# Altium PCB 175-00002 rev 4, PCB, Sinistro Clock Gen.PcbDoc (part 1 of 6)
Units mil, origin at the board's own origin, x right, y up, seen from the top; angles counter-clockwise.
Board outline 5905.51 x 4330.71 mil, 10 copper layers (Top Layer (.GTL), MidLayer1 (*.G1), +12V (*.GP1), -12V (*.GP2), A & GND (*.GP3), Chassis E (*.GP4), +28V & VCC (*.GP5), MidLayer2 (*.G2), MidLayer3 (*.G3), Bottom Layer (.GBL)), stack 64.6 mil thick; 505 components, 332 nets, 1954 pads, 918 vias.
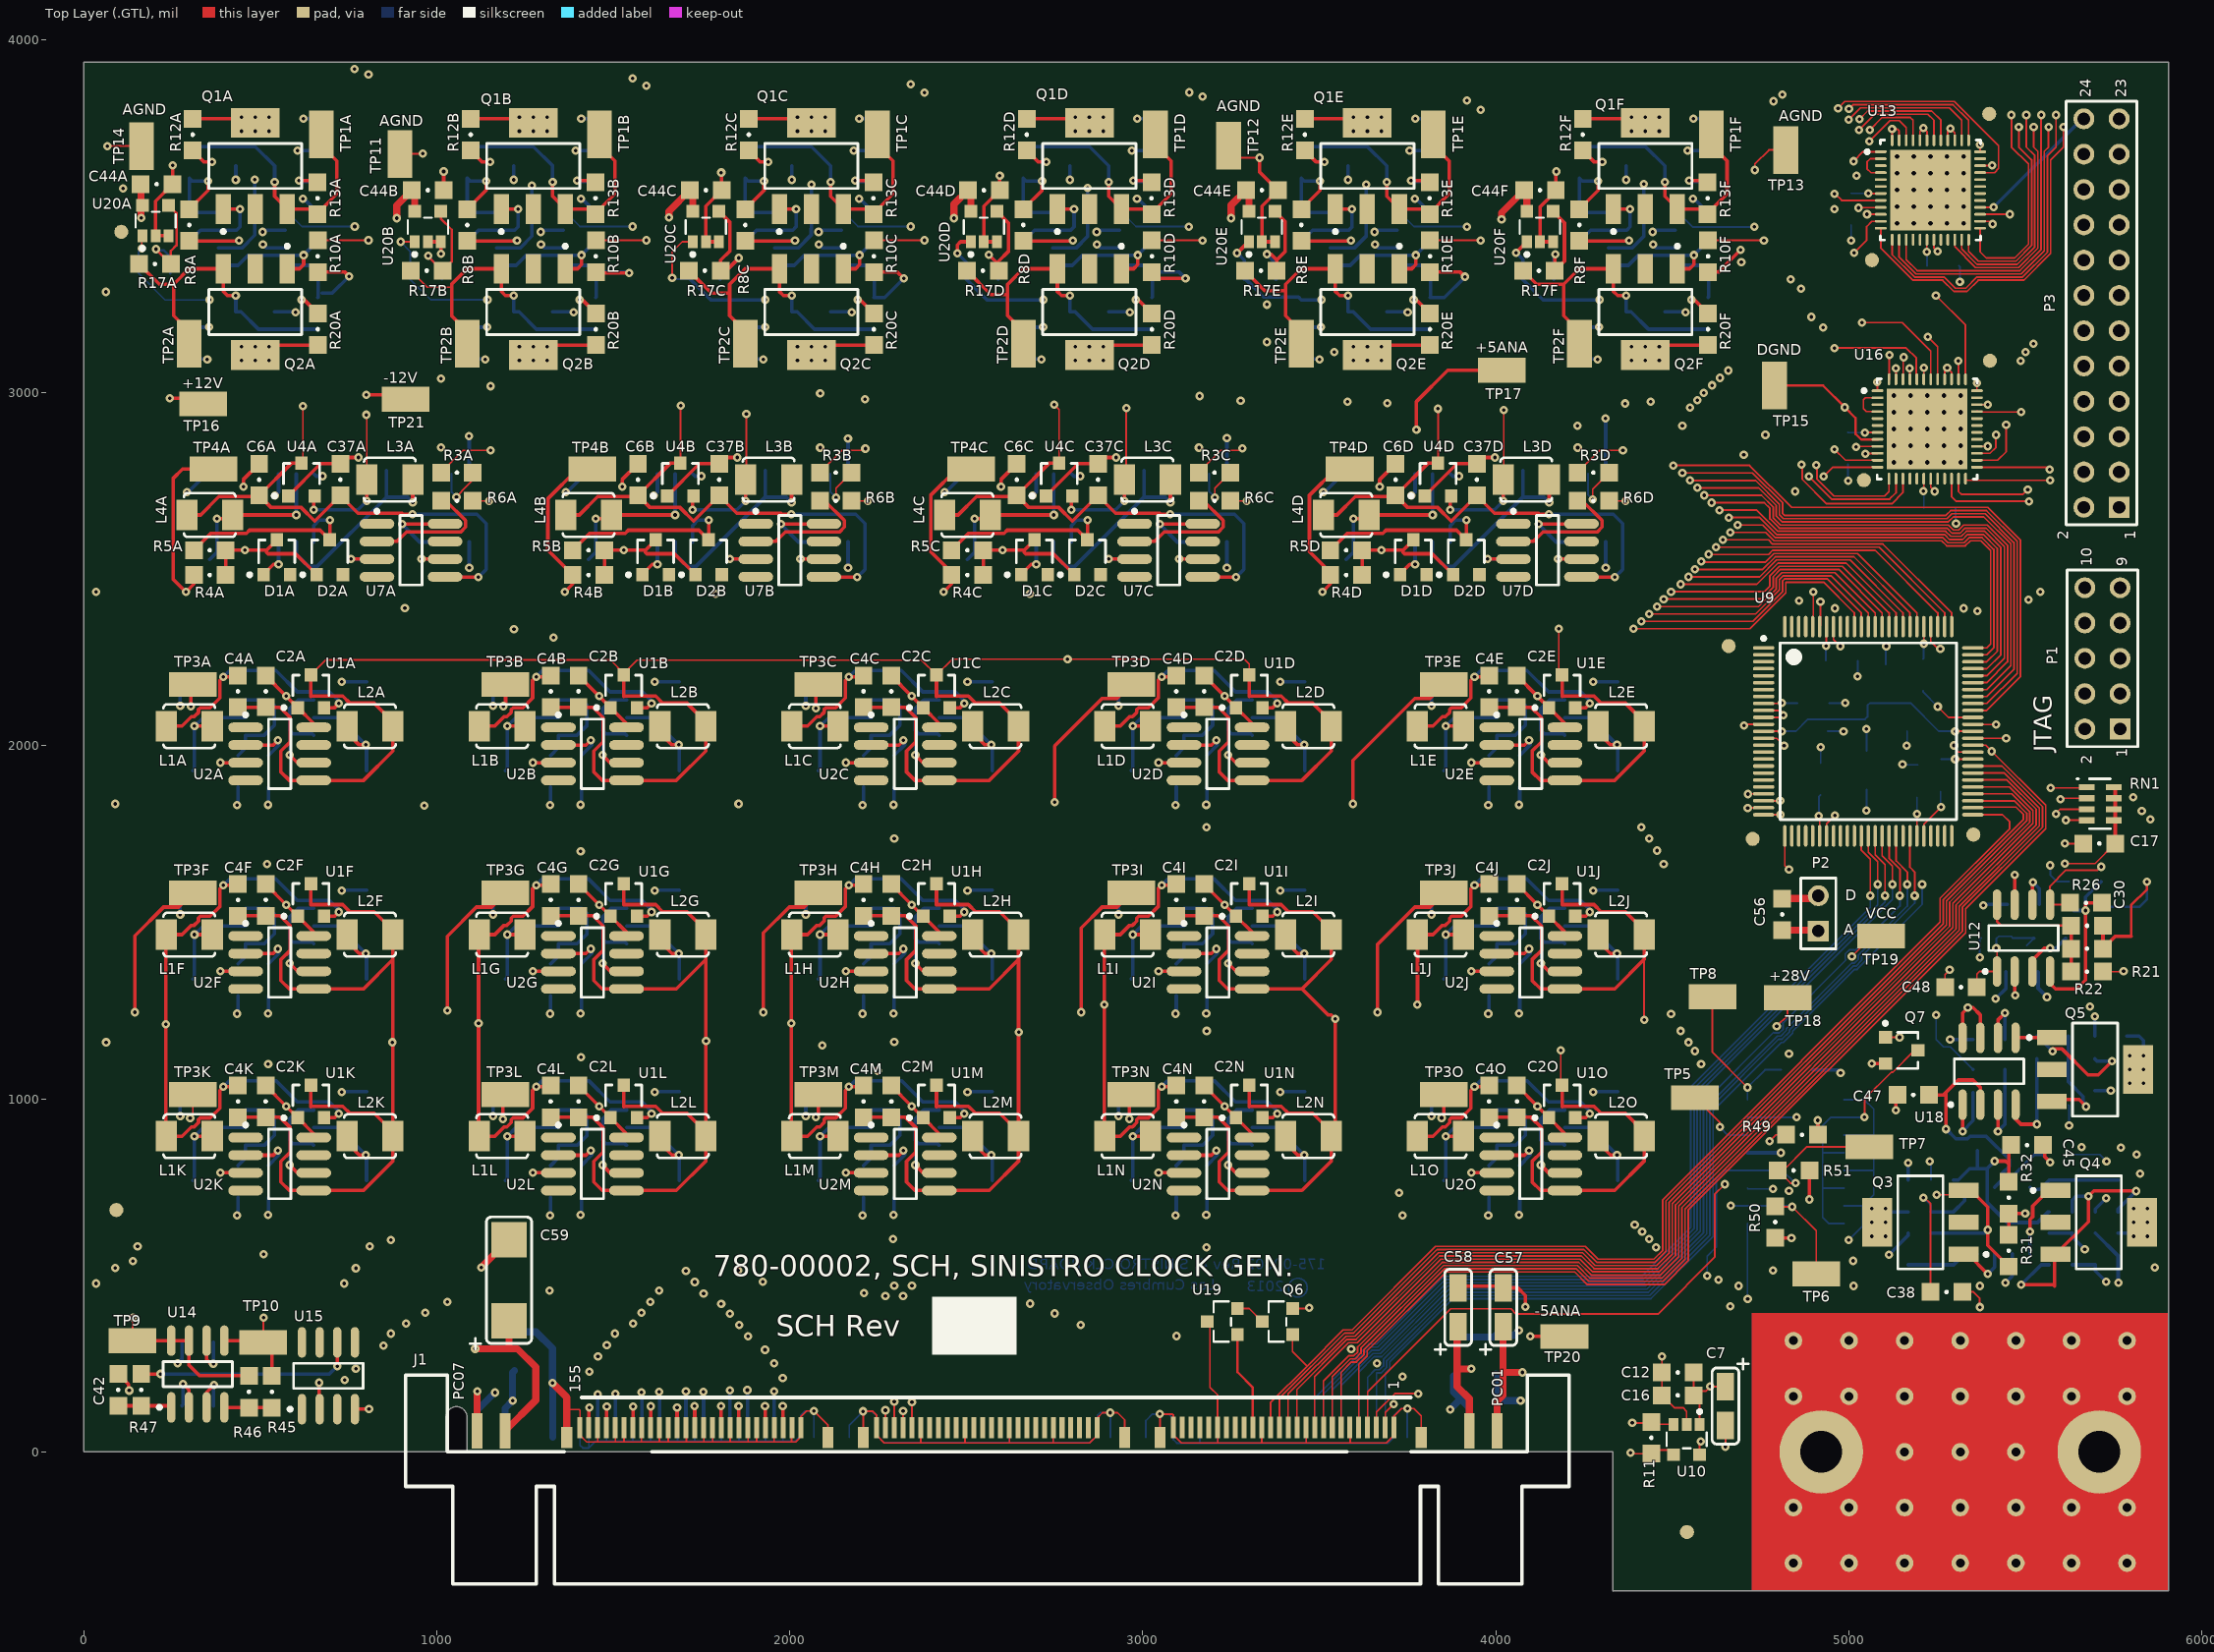
[diagram p0: Top Layer (.GTL) view]
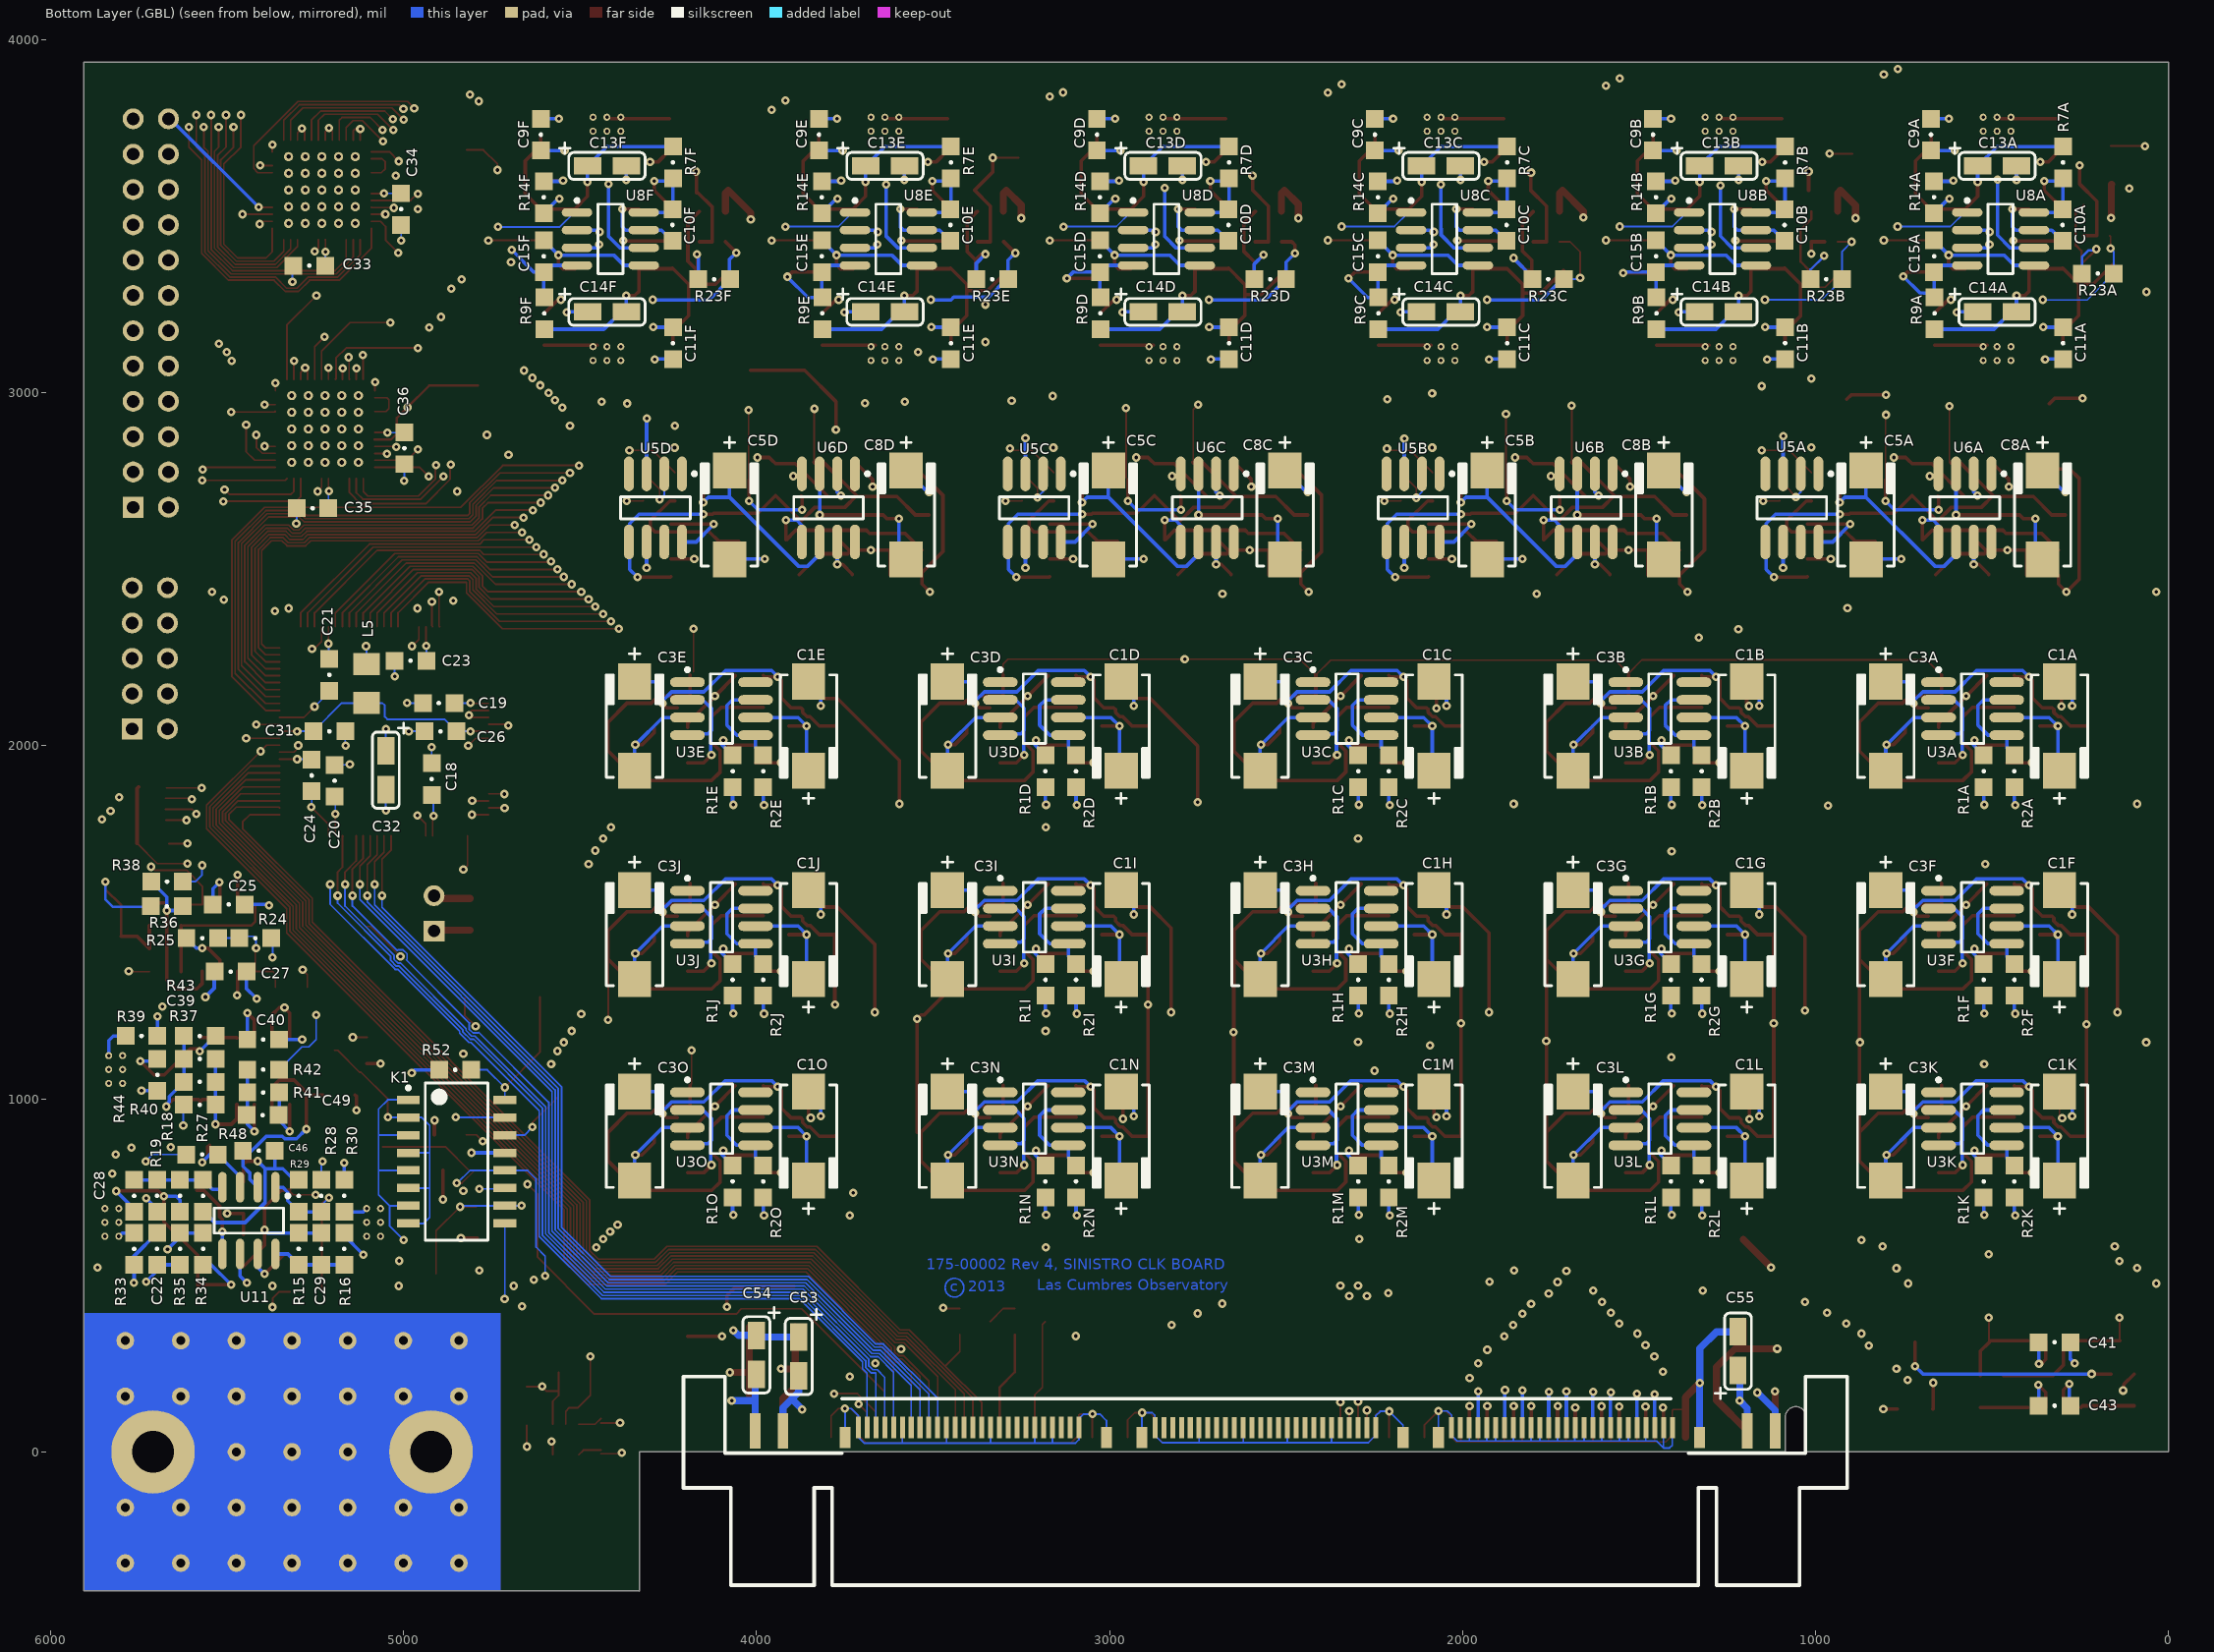
[diagram p1: Bottom Layer (.GBL) view, seen from below]
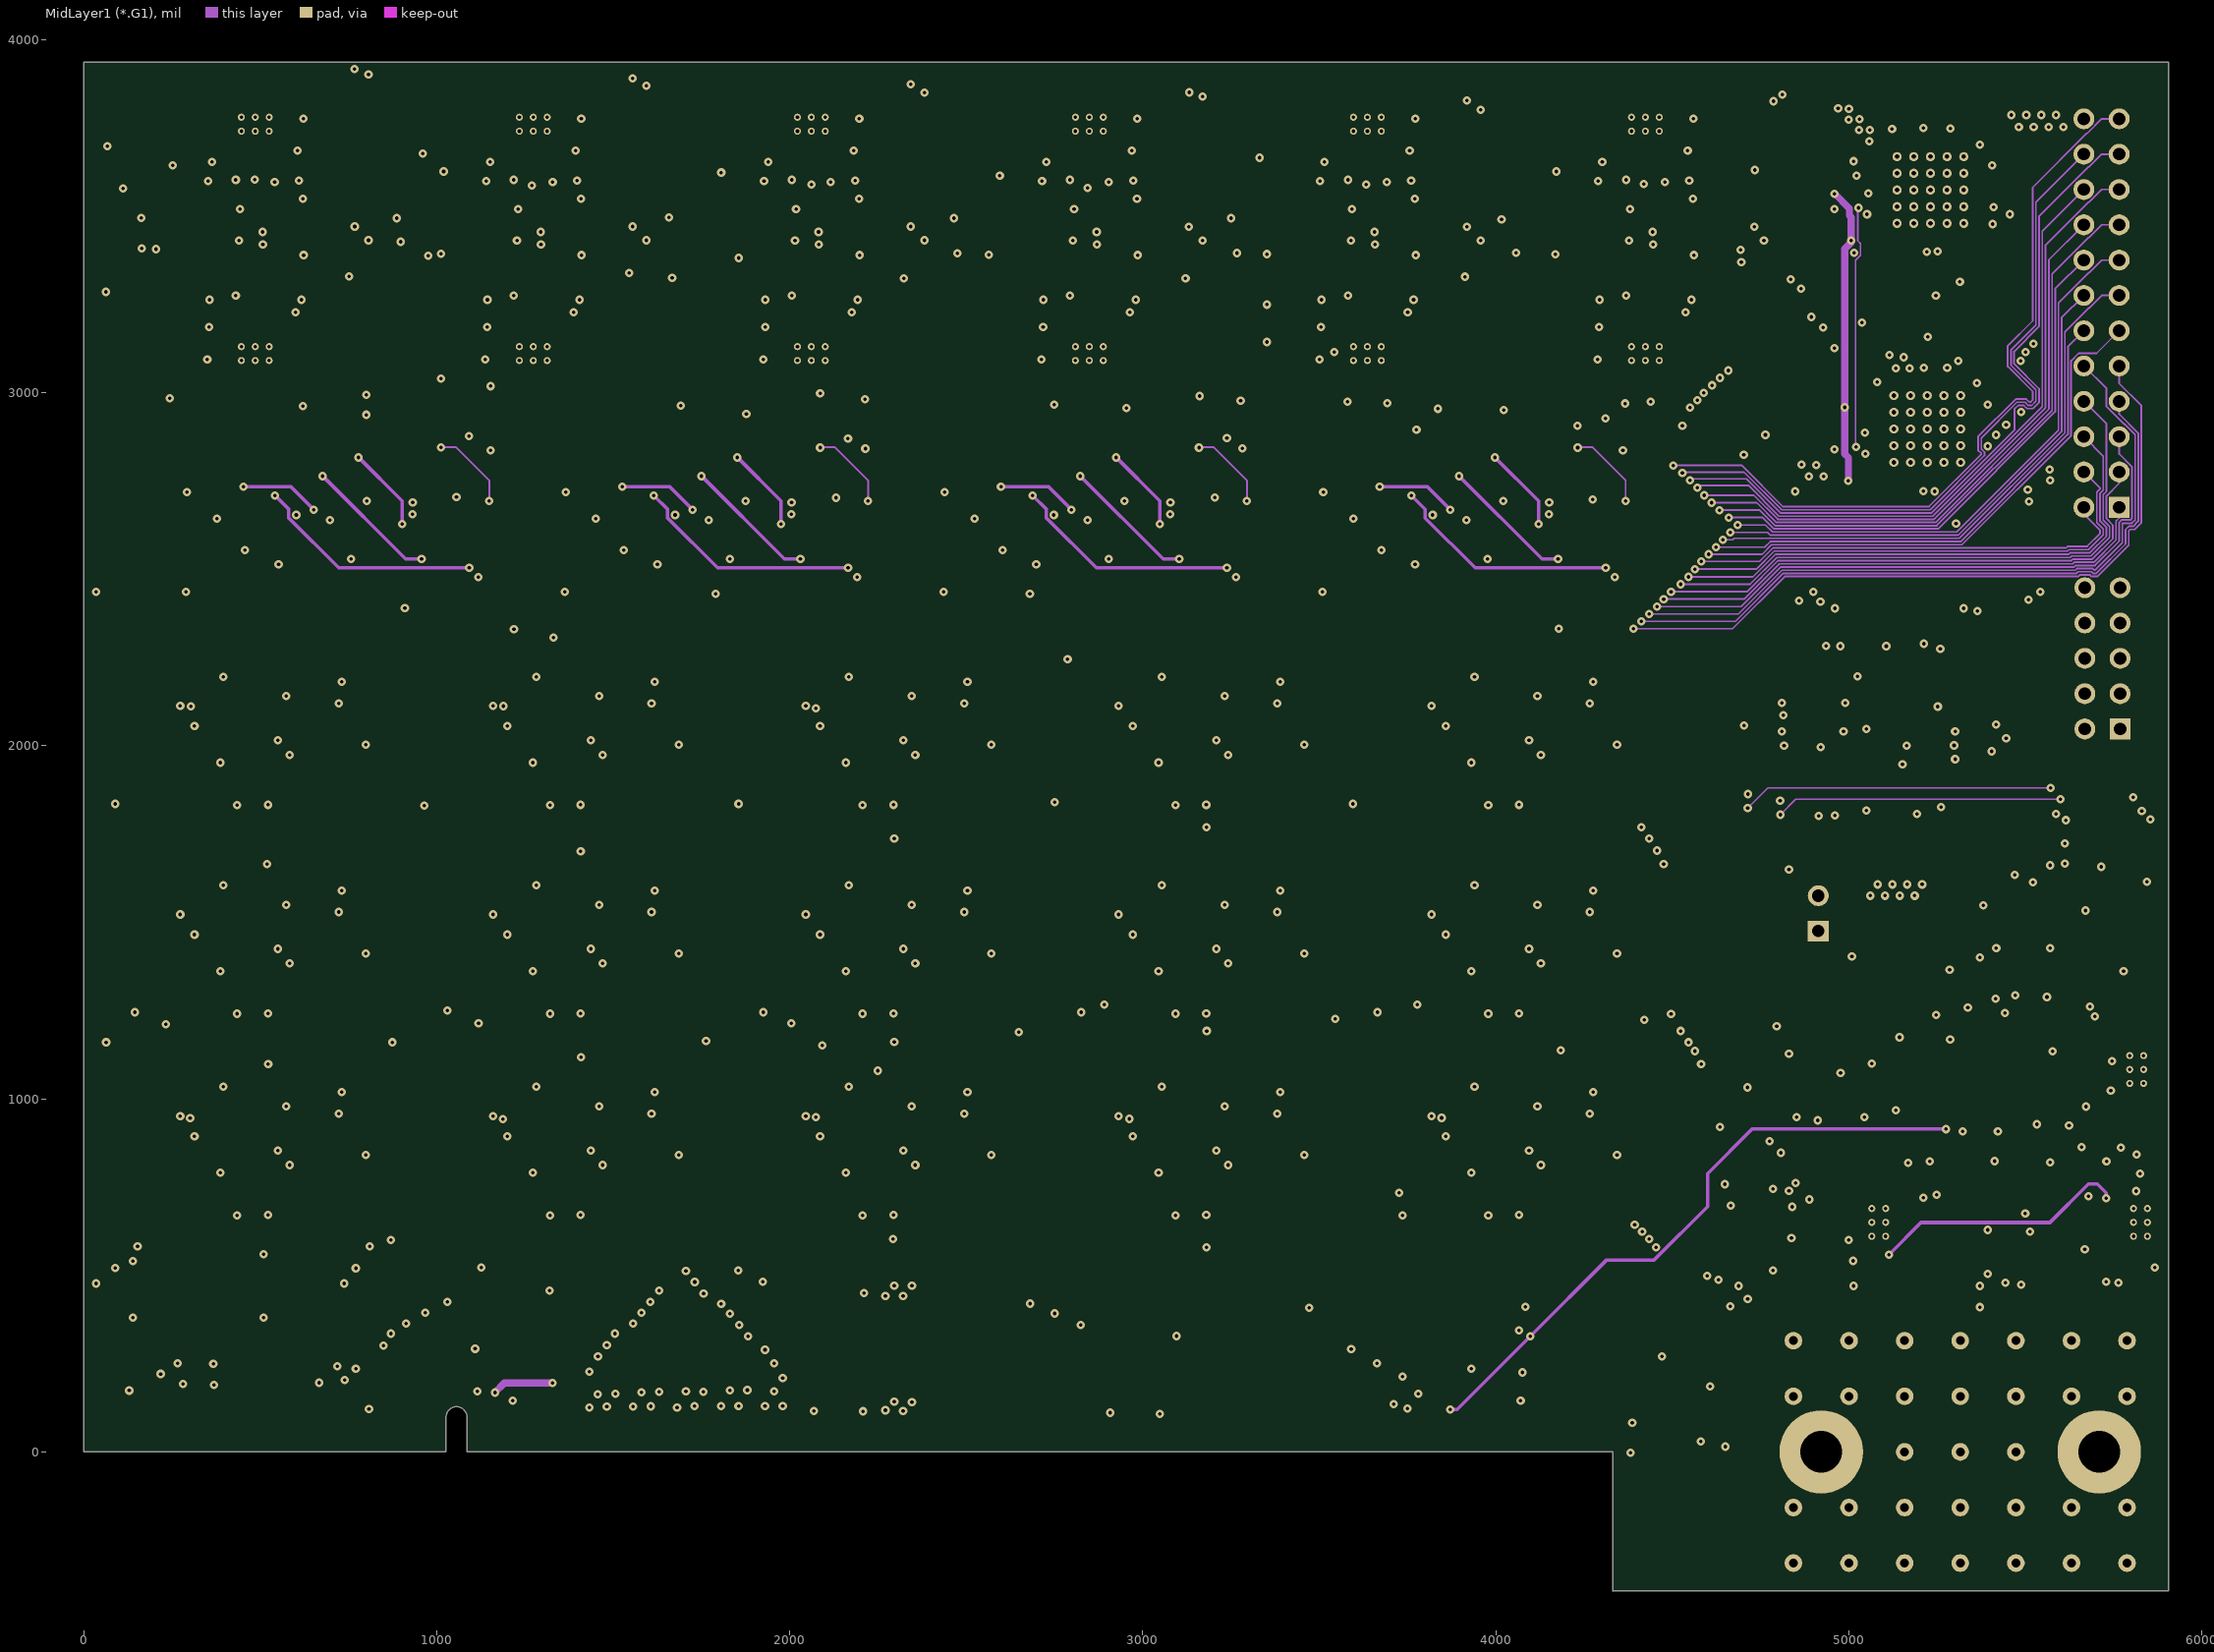
[diagram p2: MidLayer1 (*.G1)]
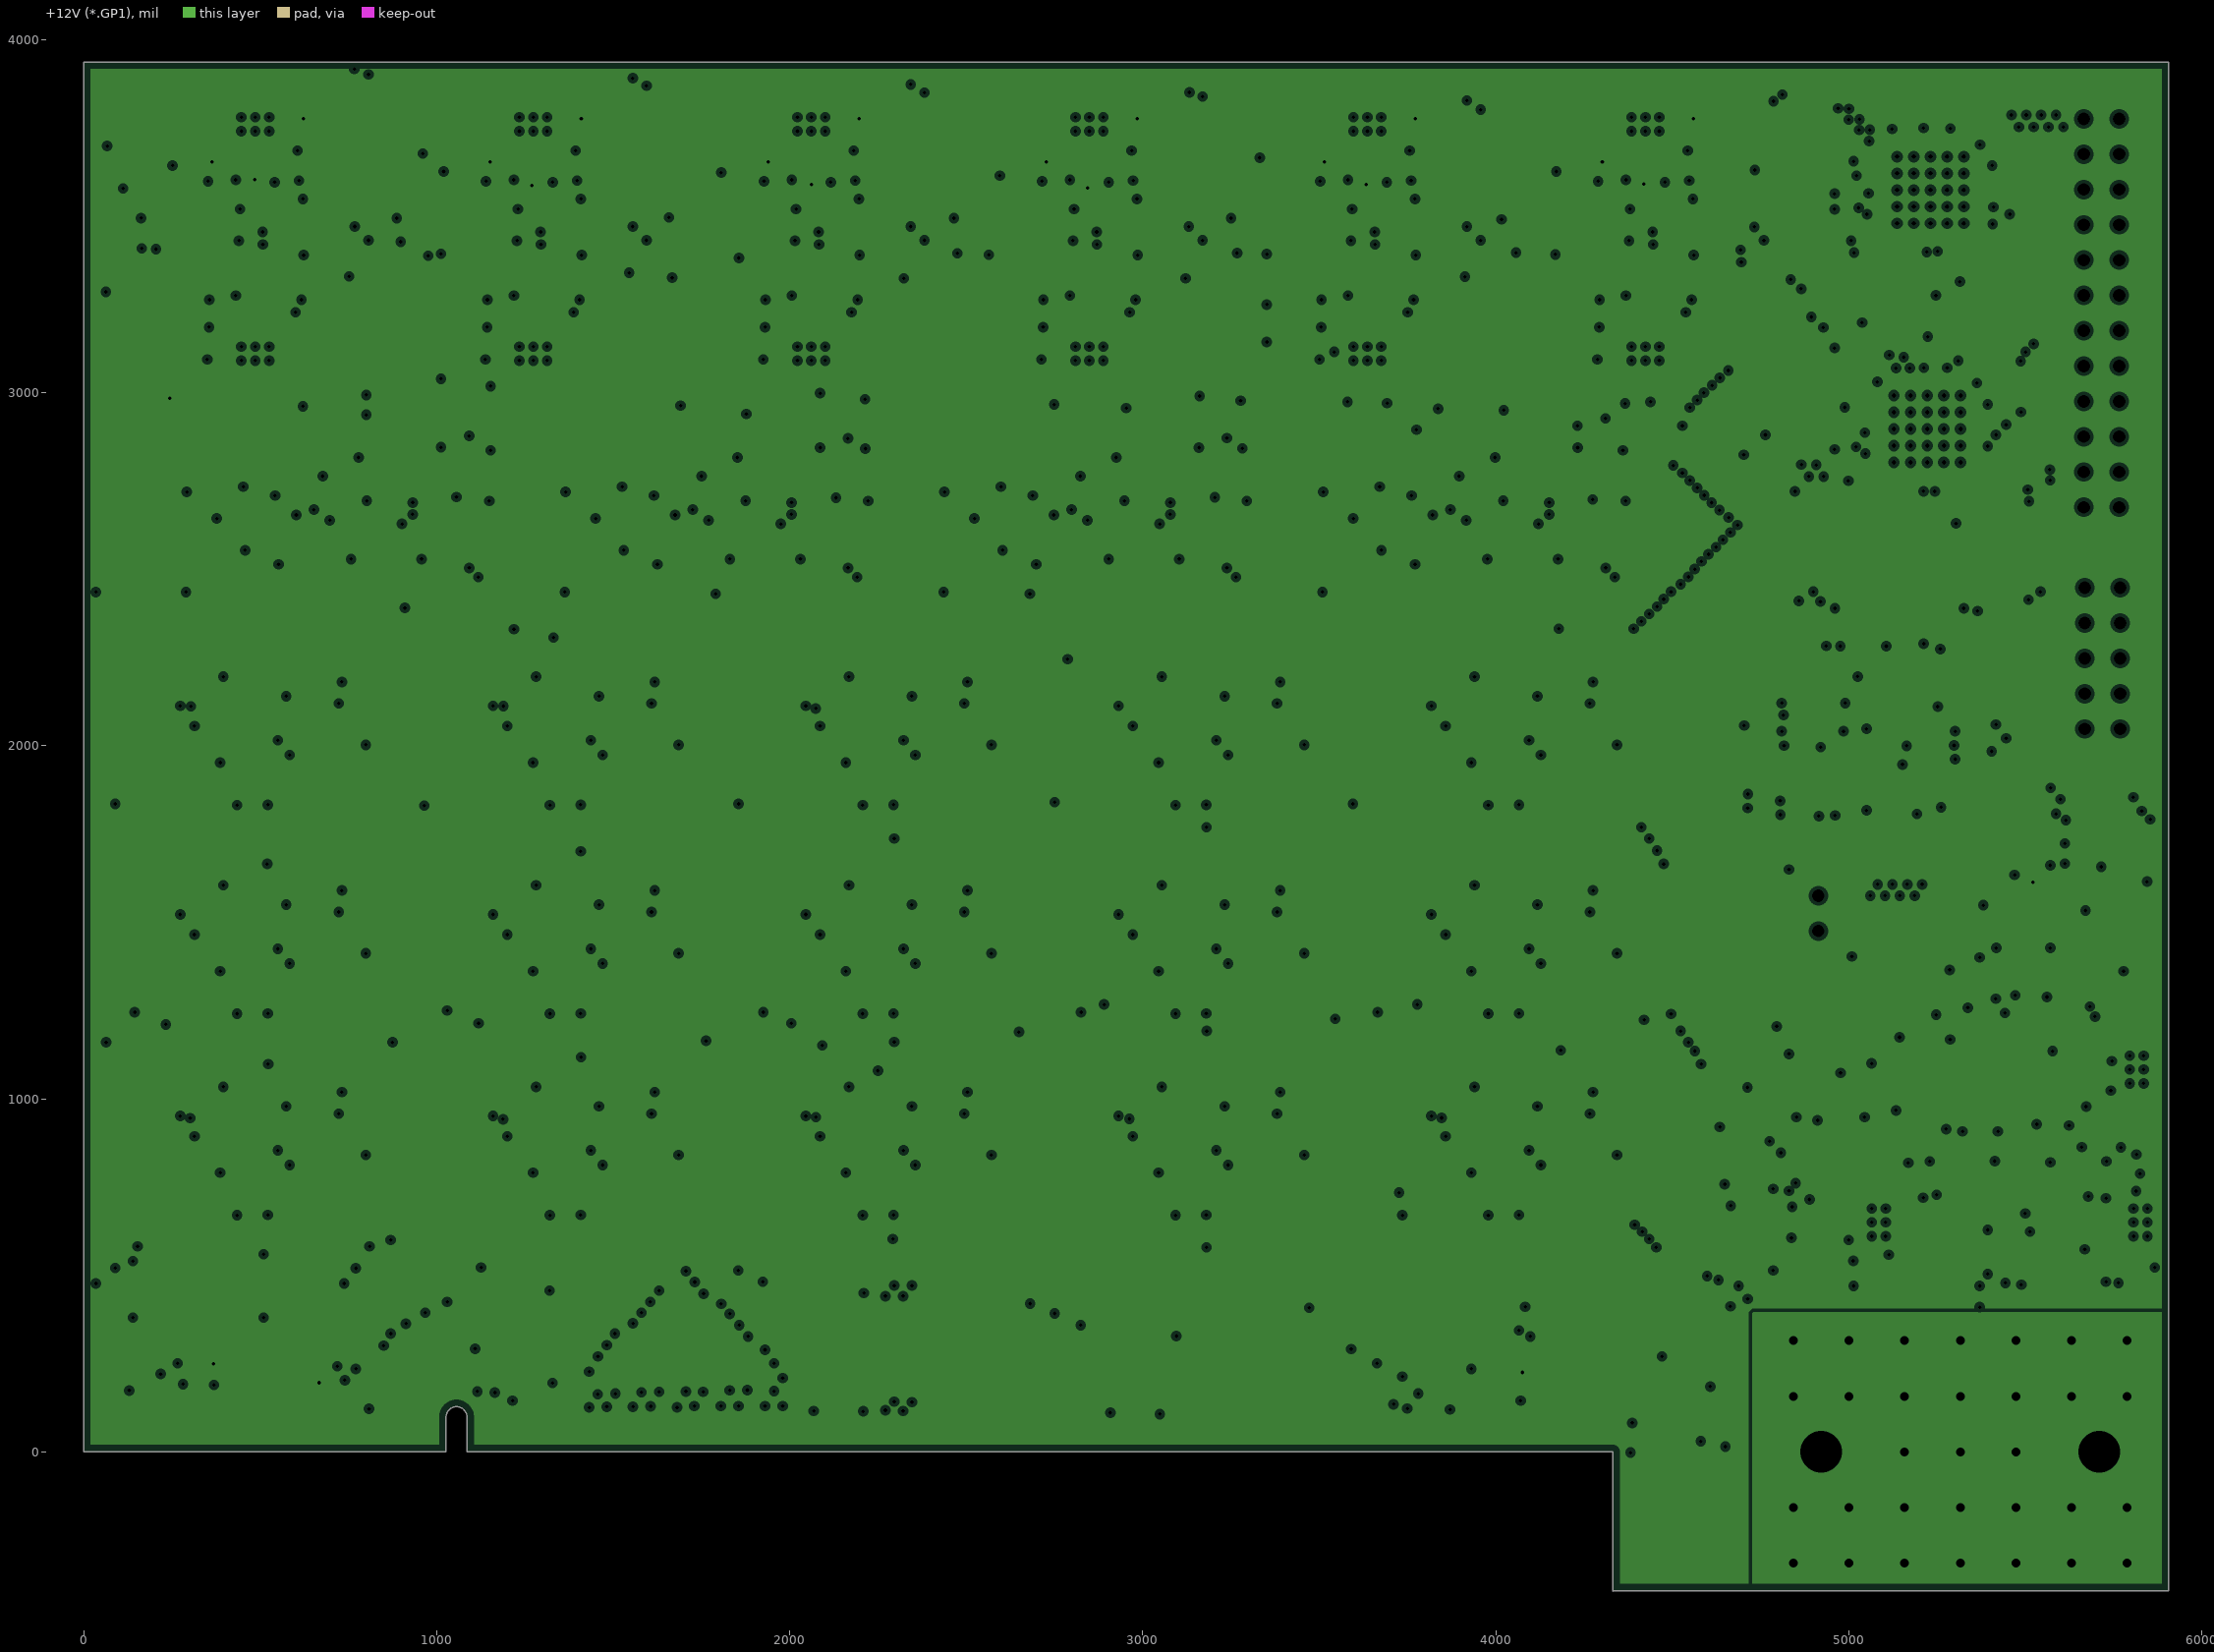
[diagram p3: +12V (*.GP1), clearances drawn from the general rule]
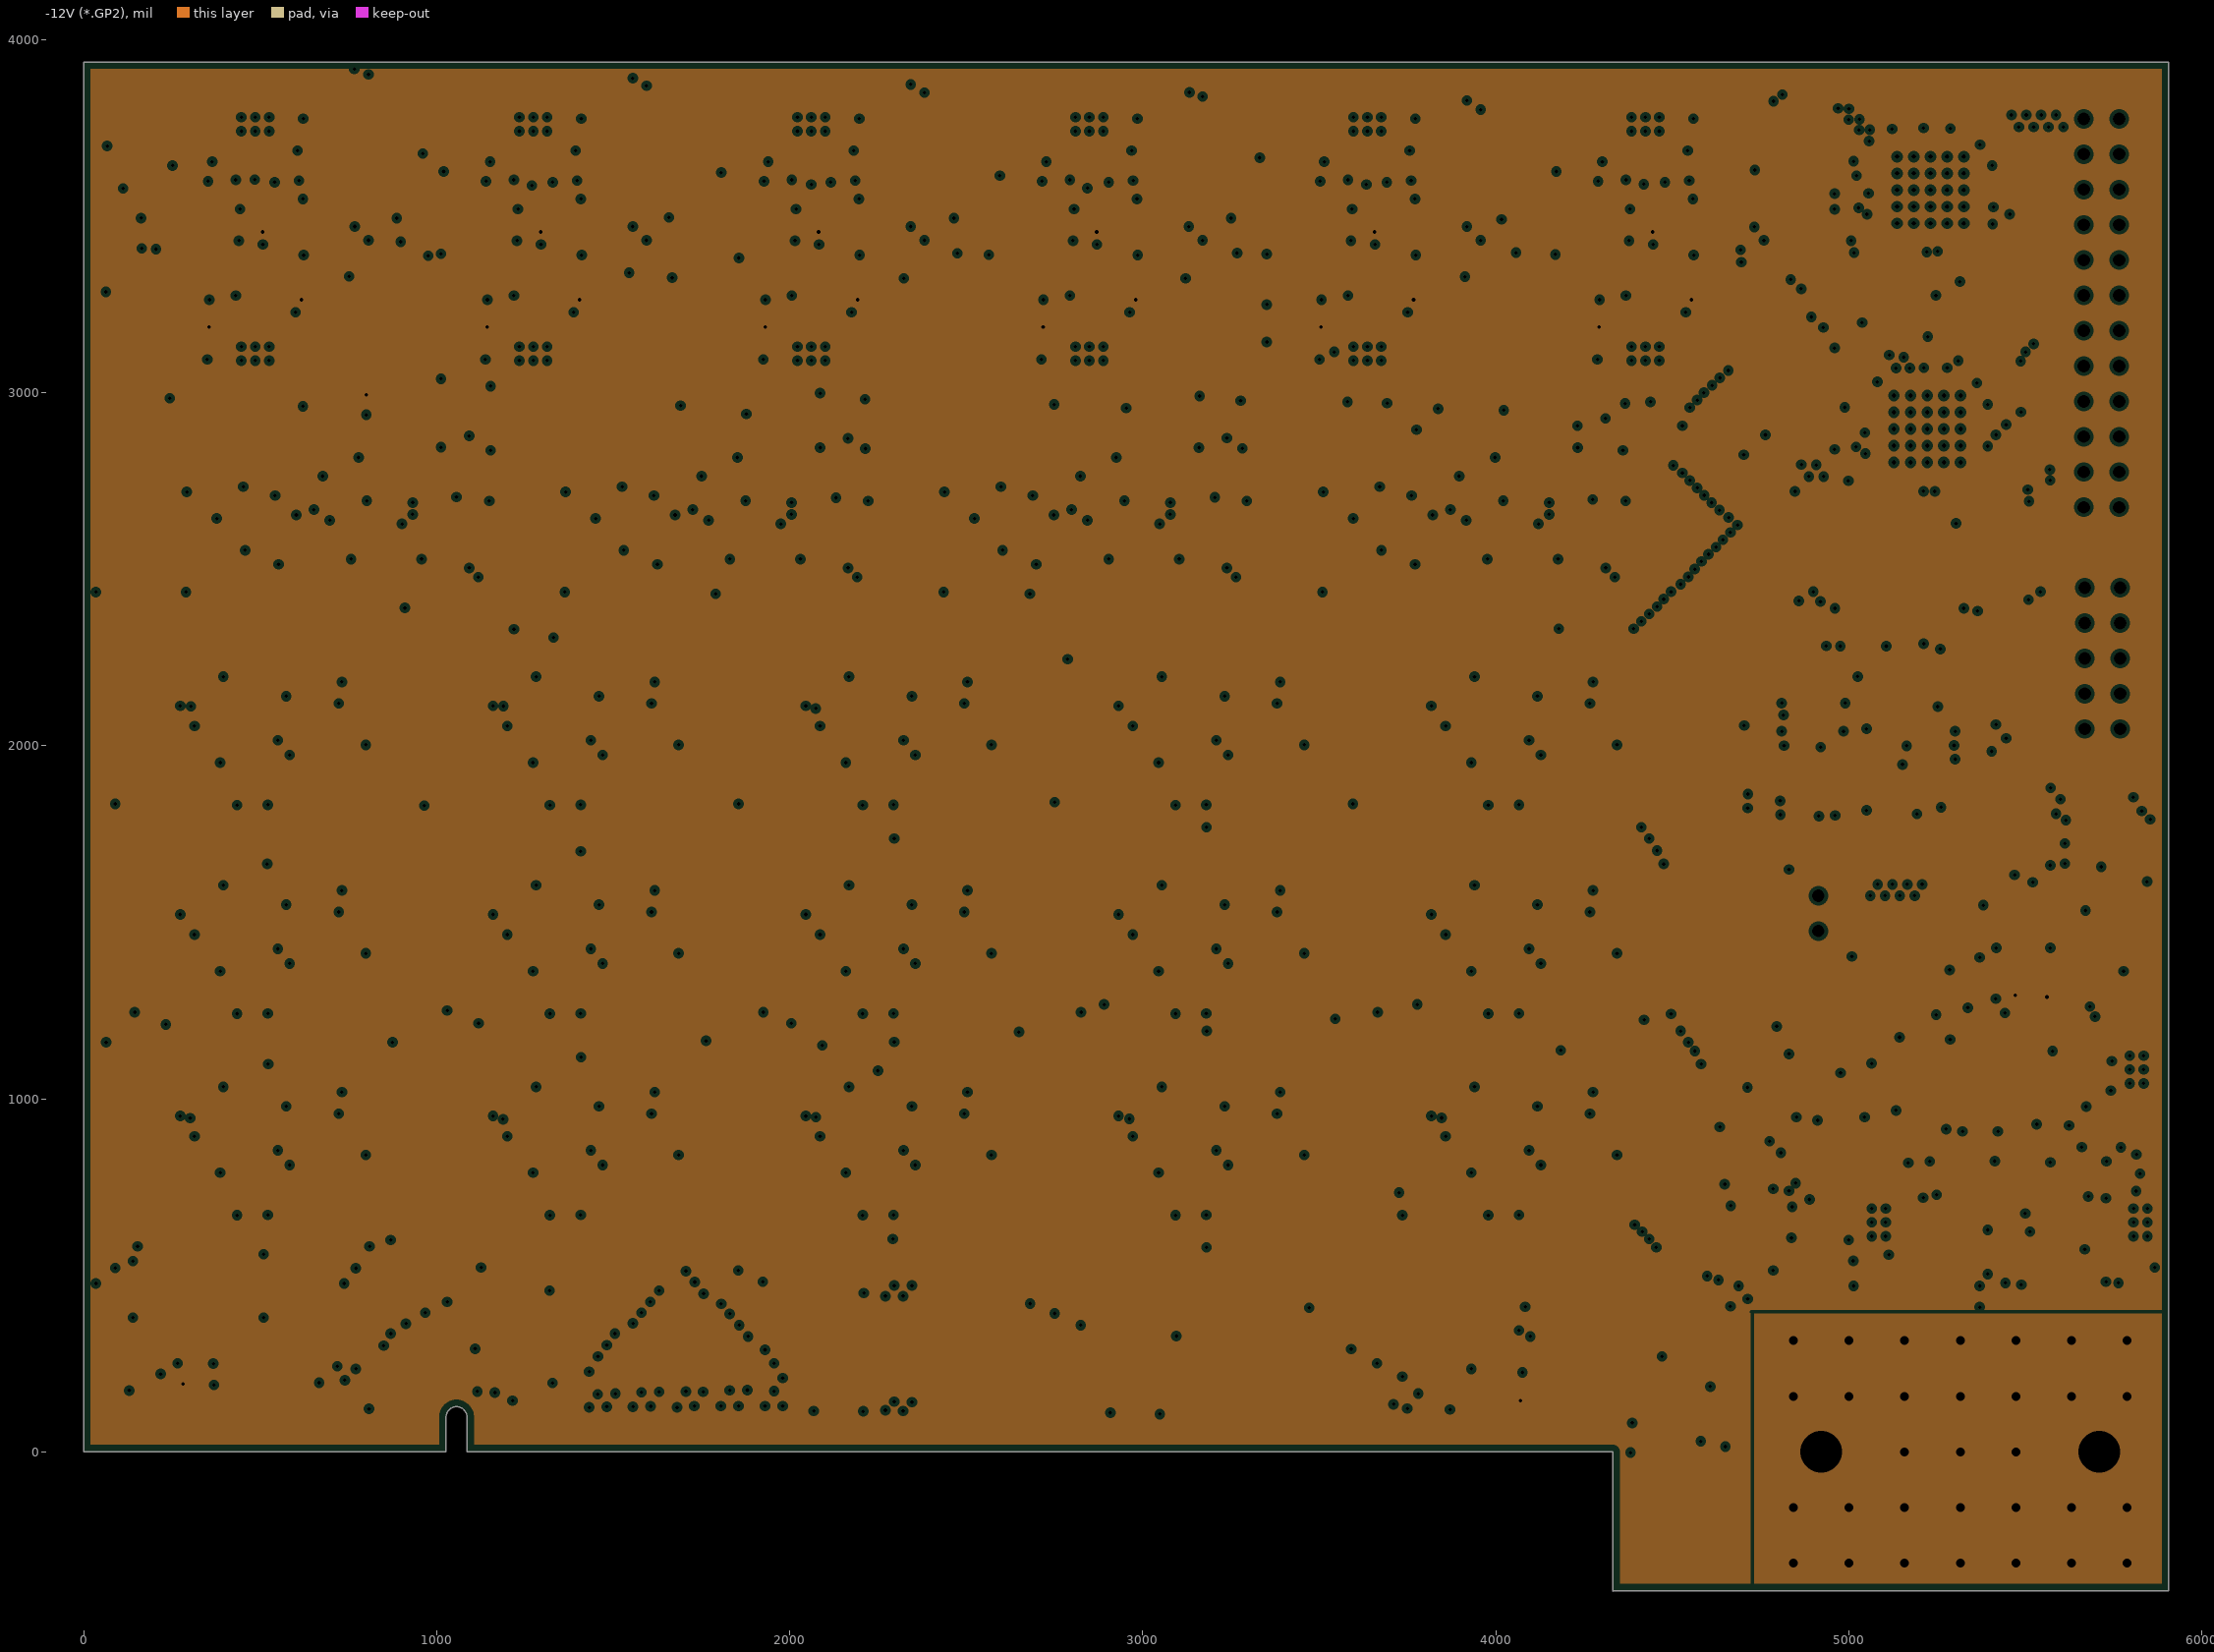
[diagram p4: -12V (*.GP2), clearances drawn from the general rule]
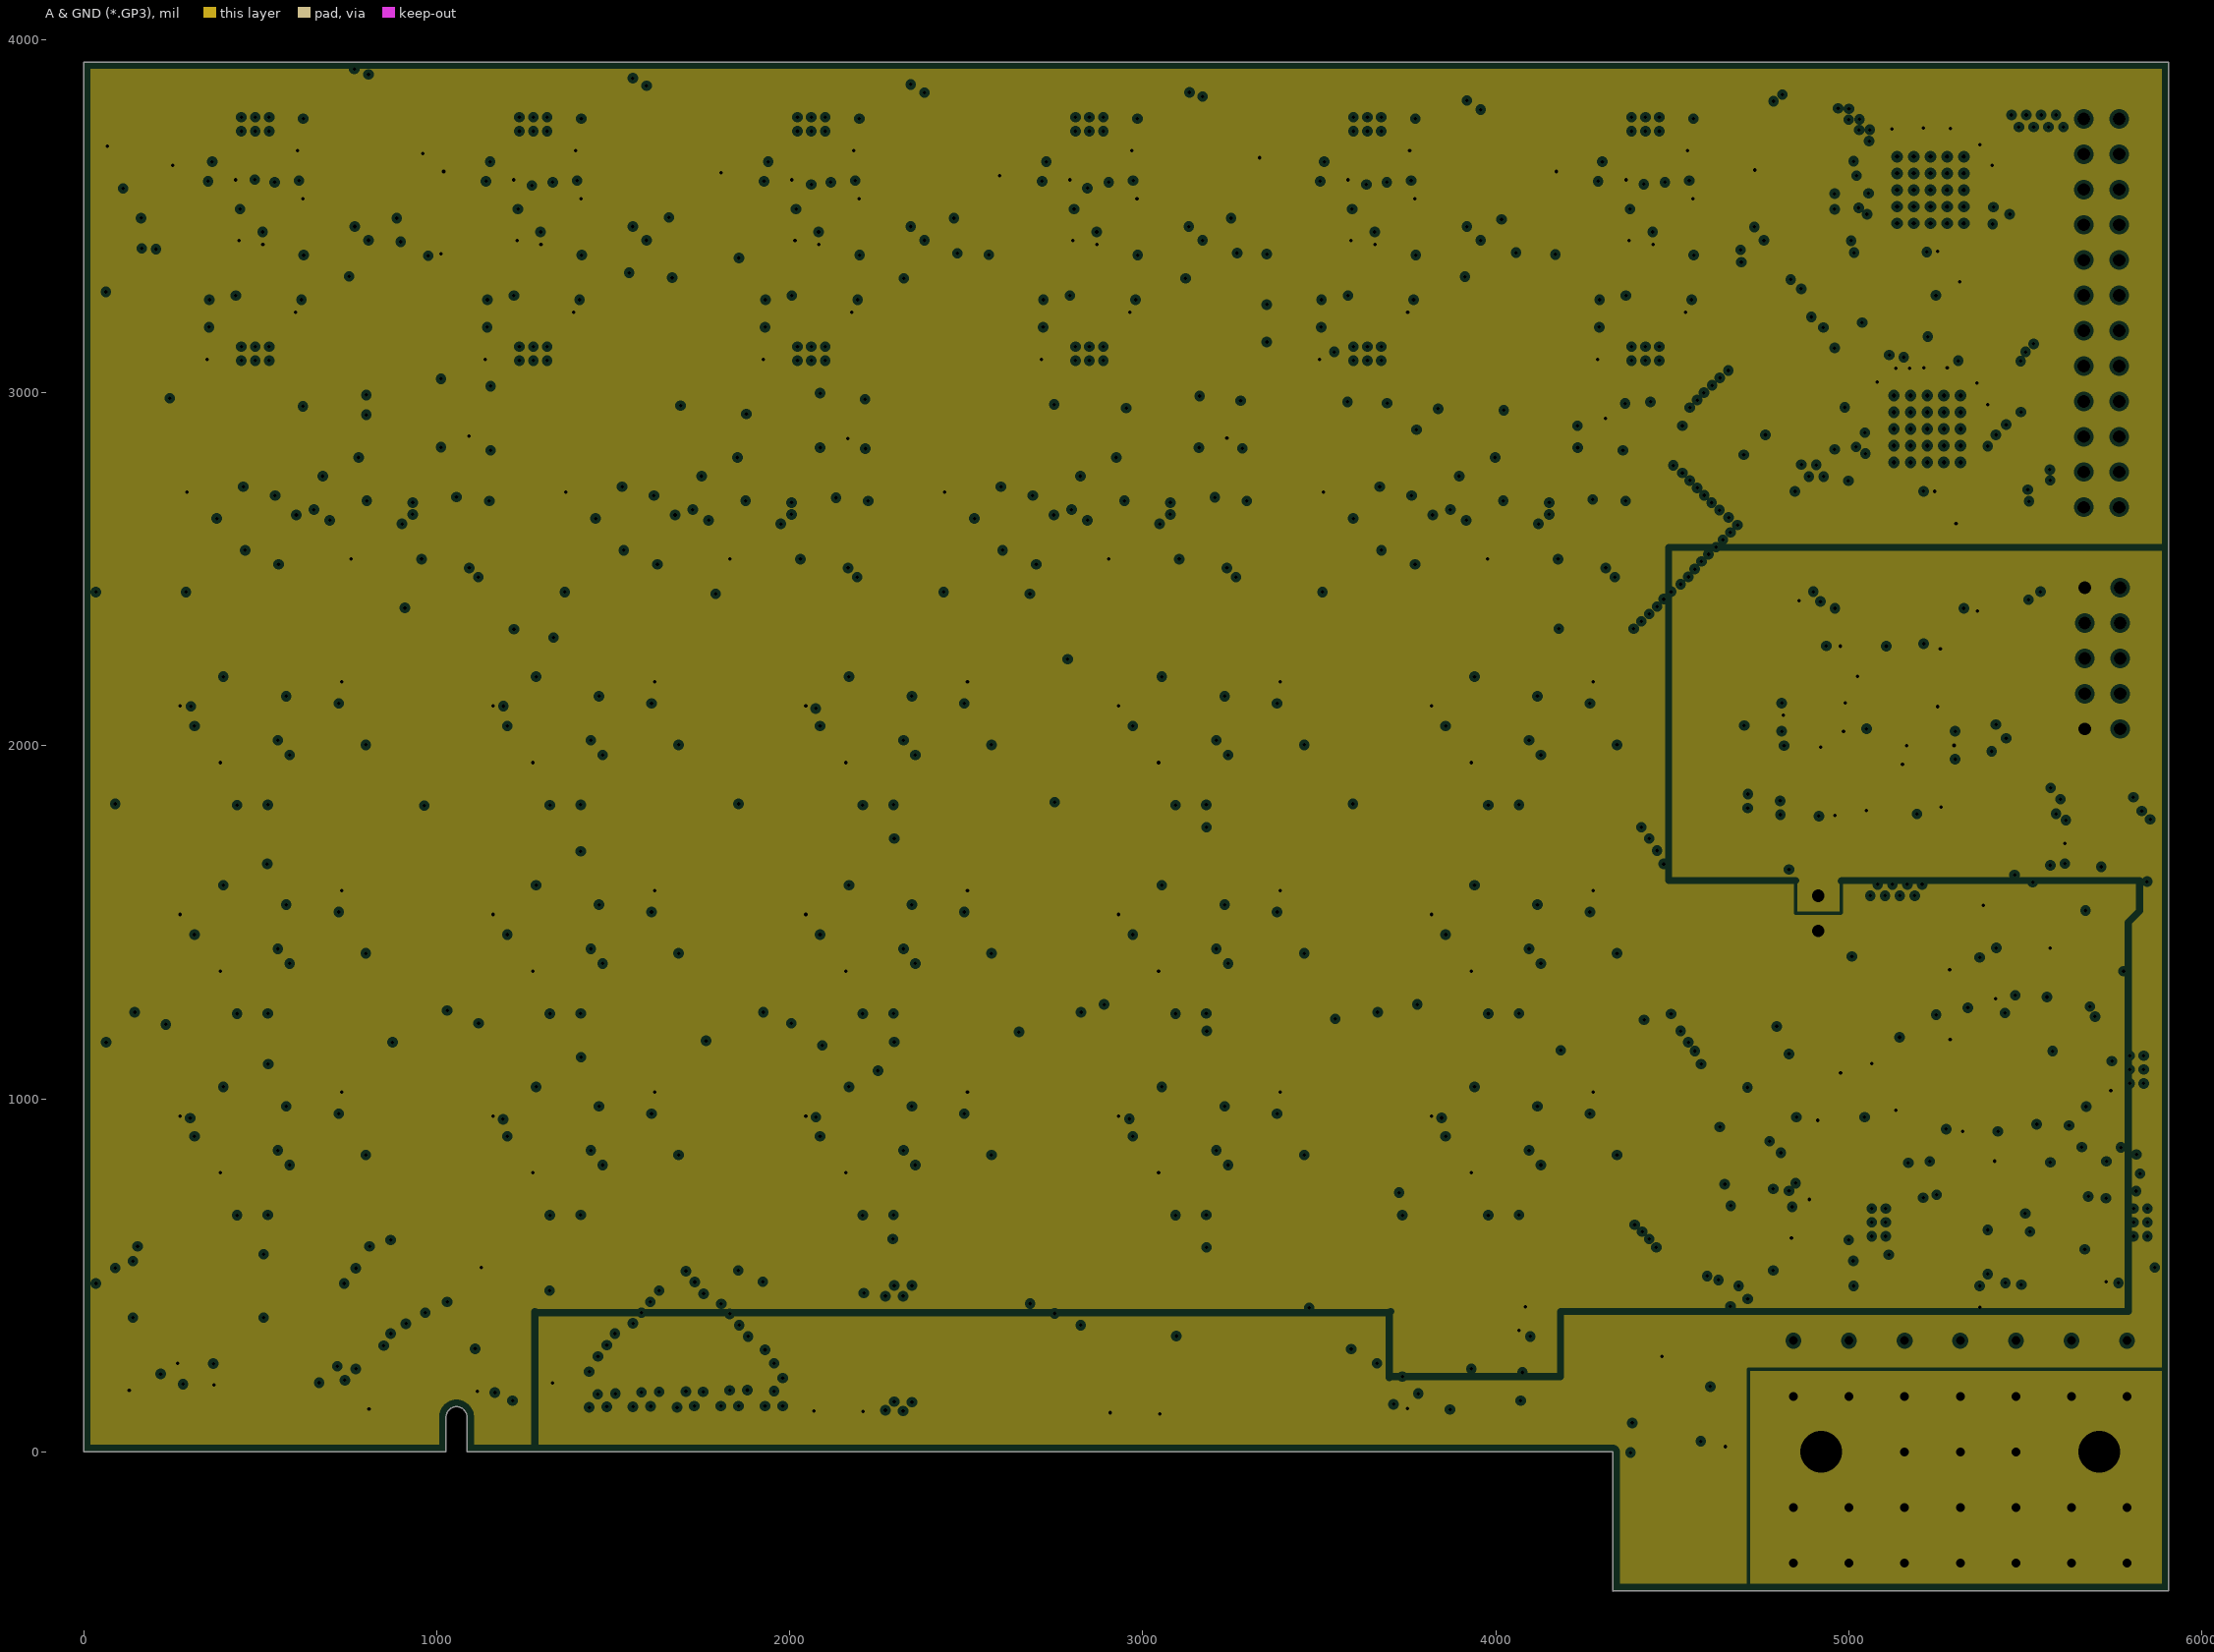
[diagram p5: A & GND (*.GP3), clearances drawn from the general rule]
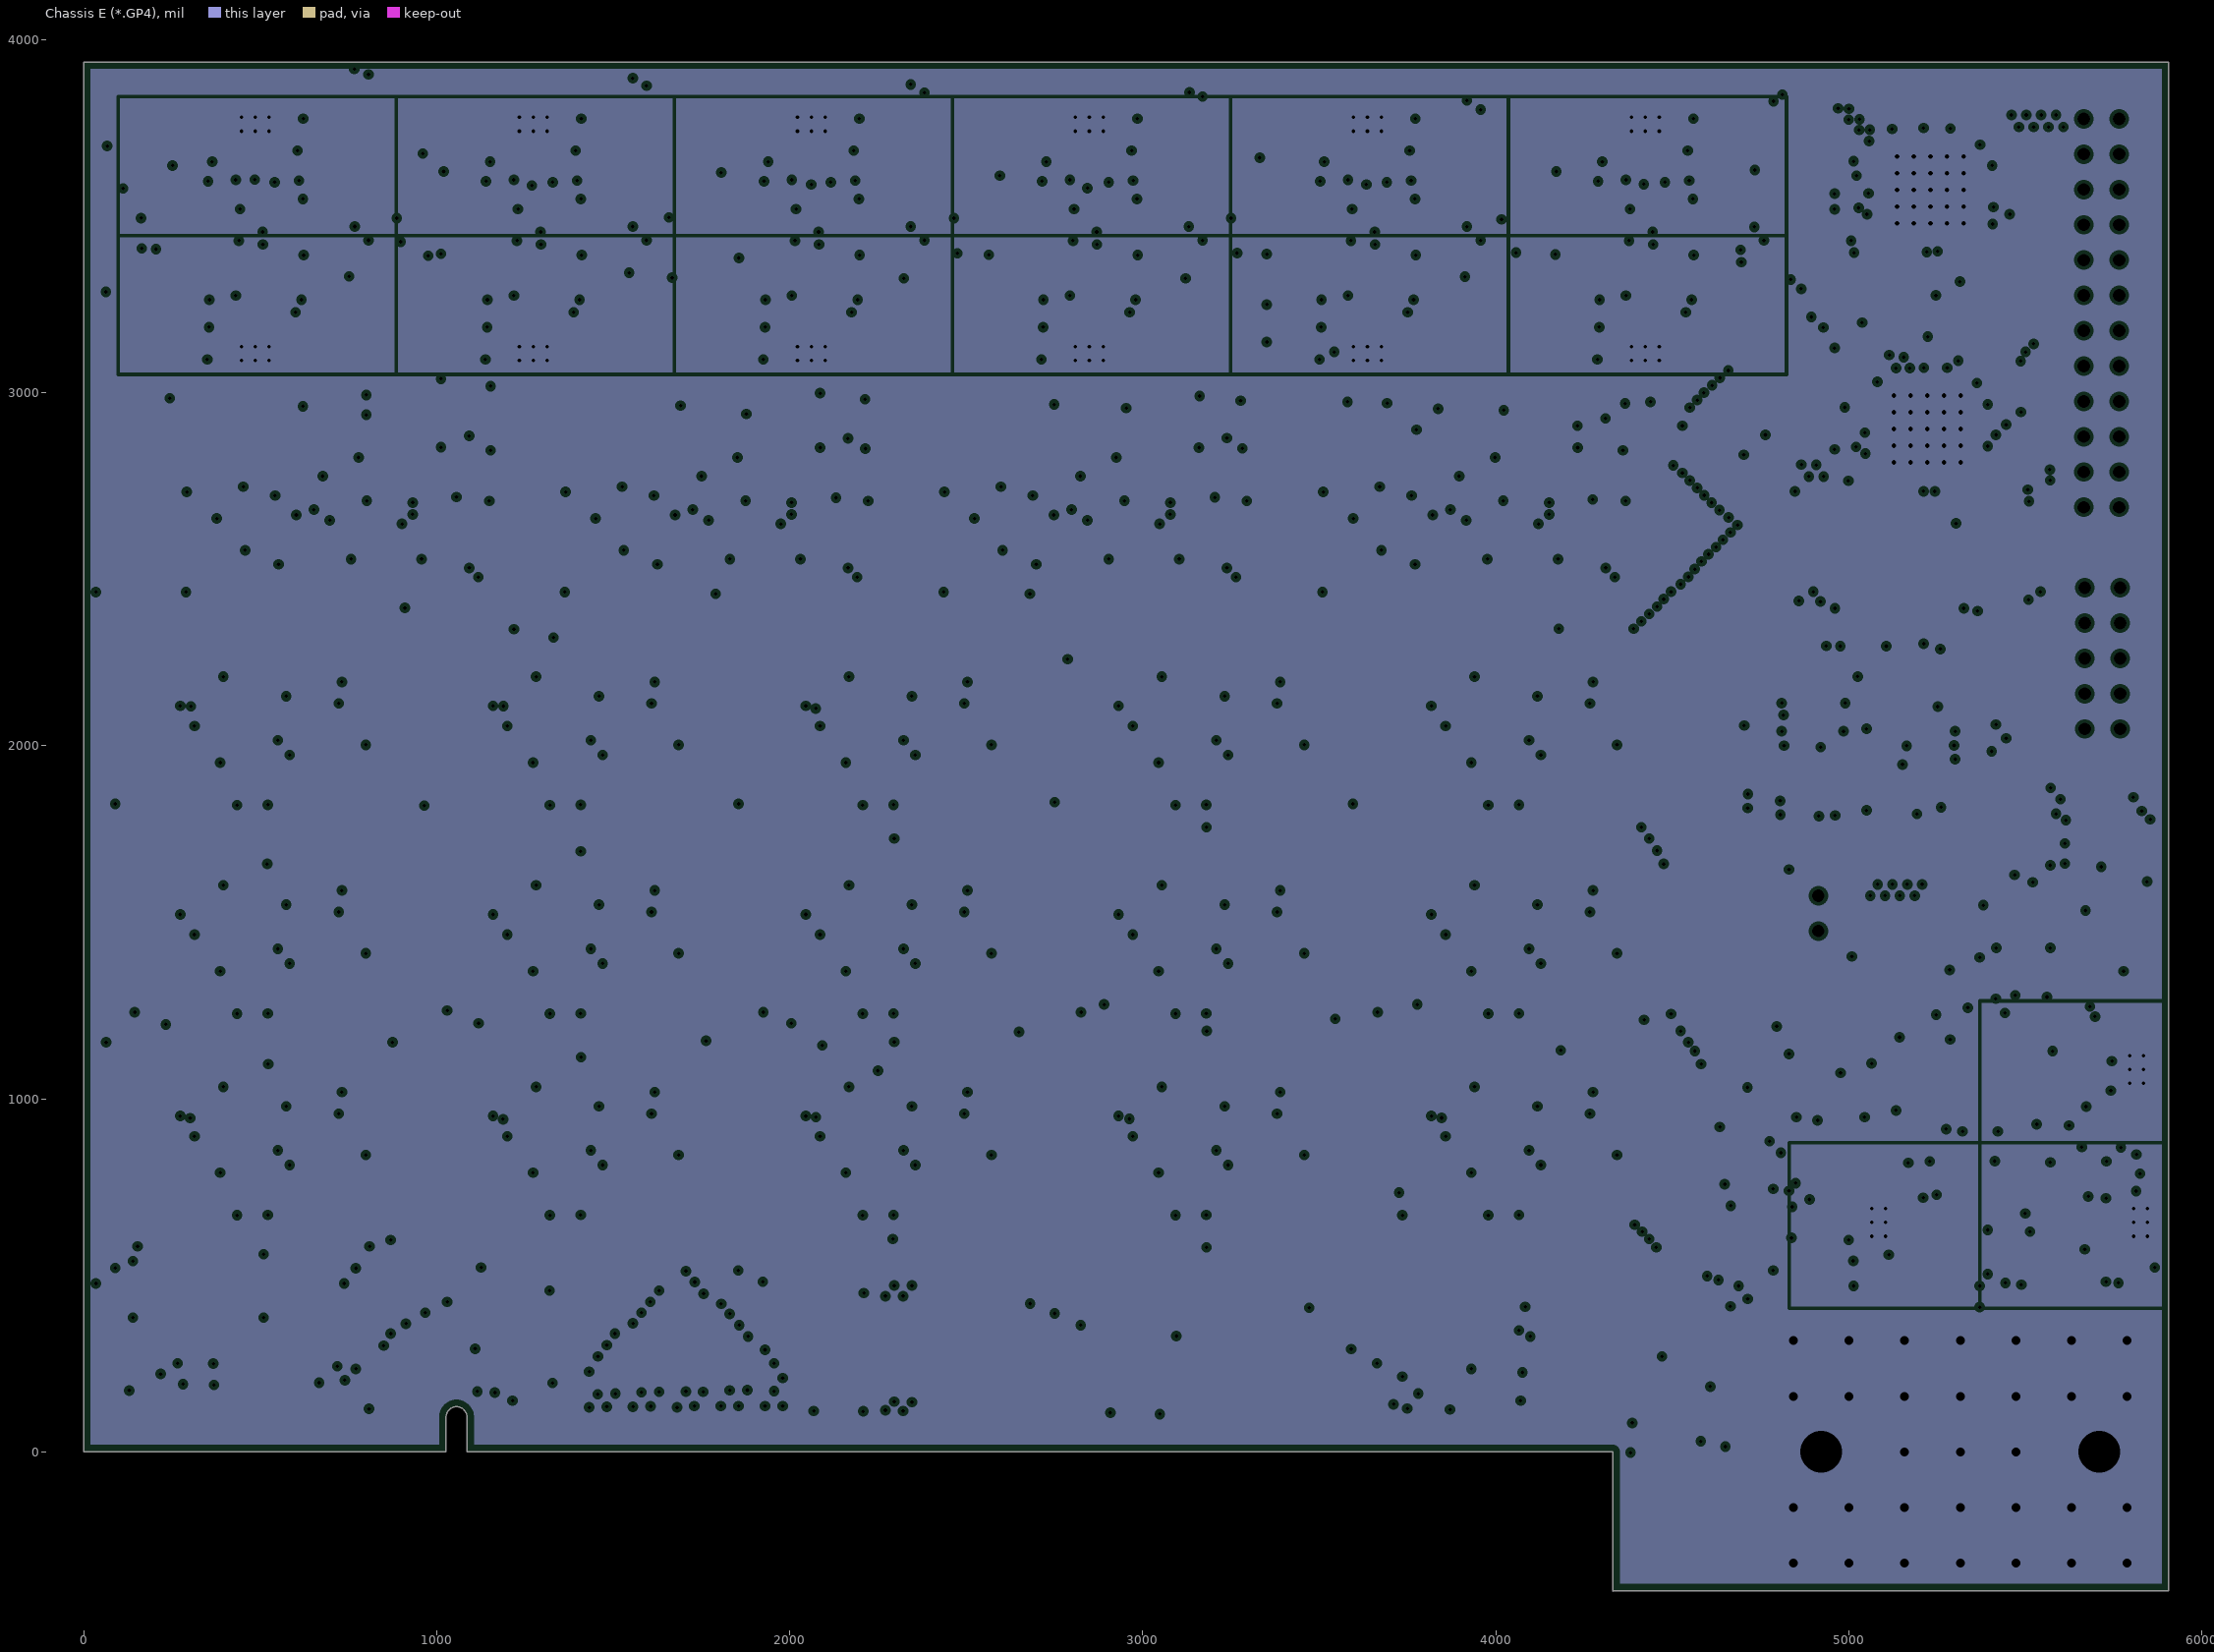
[diagram p6: Chassis E (*.GP4), clearances drawn from the general rule]
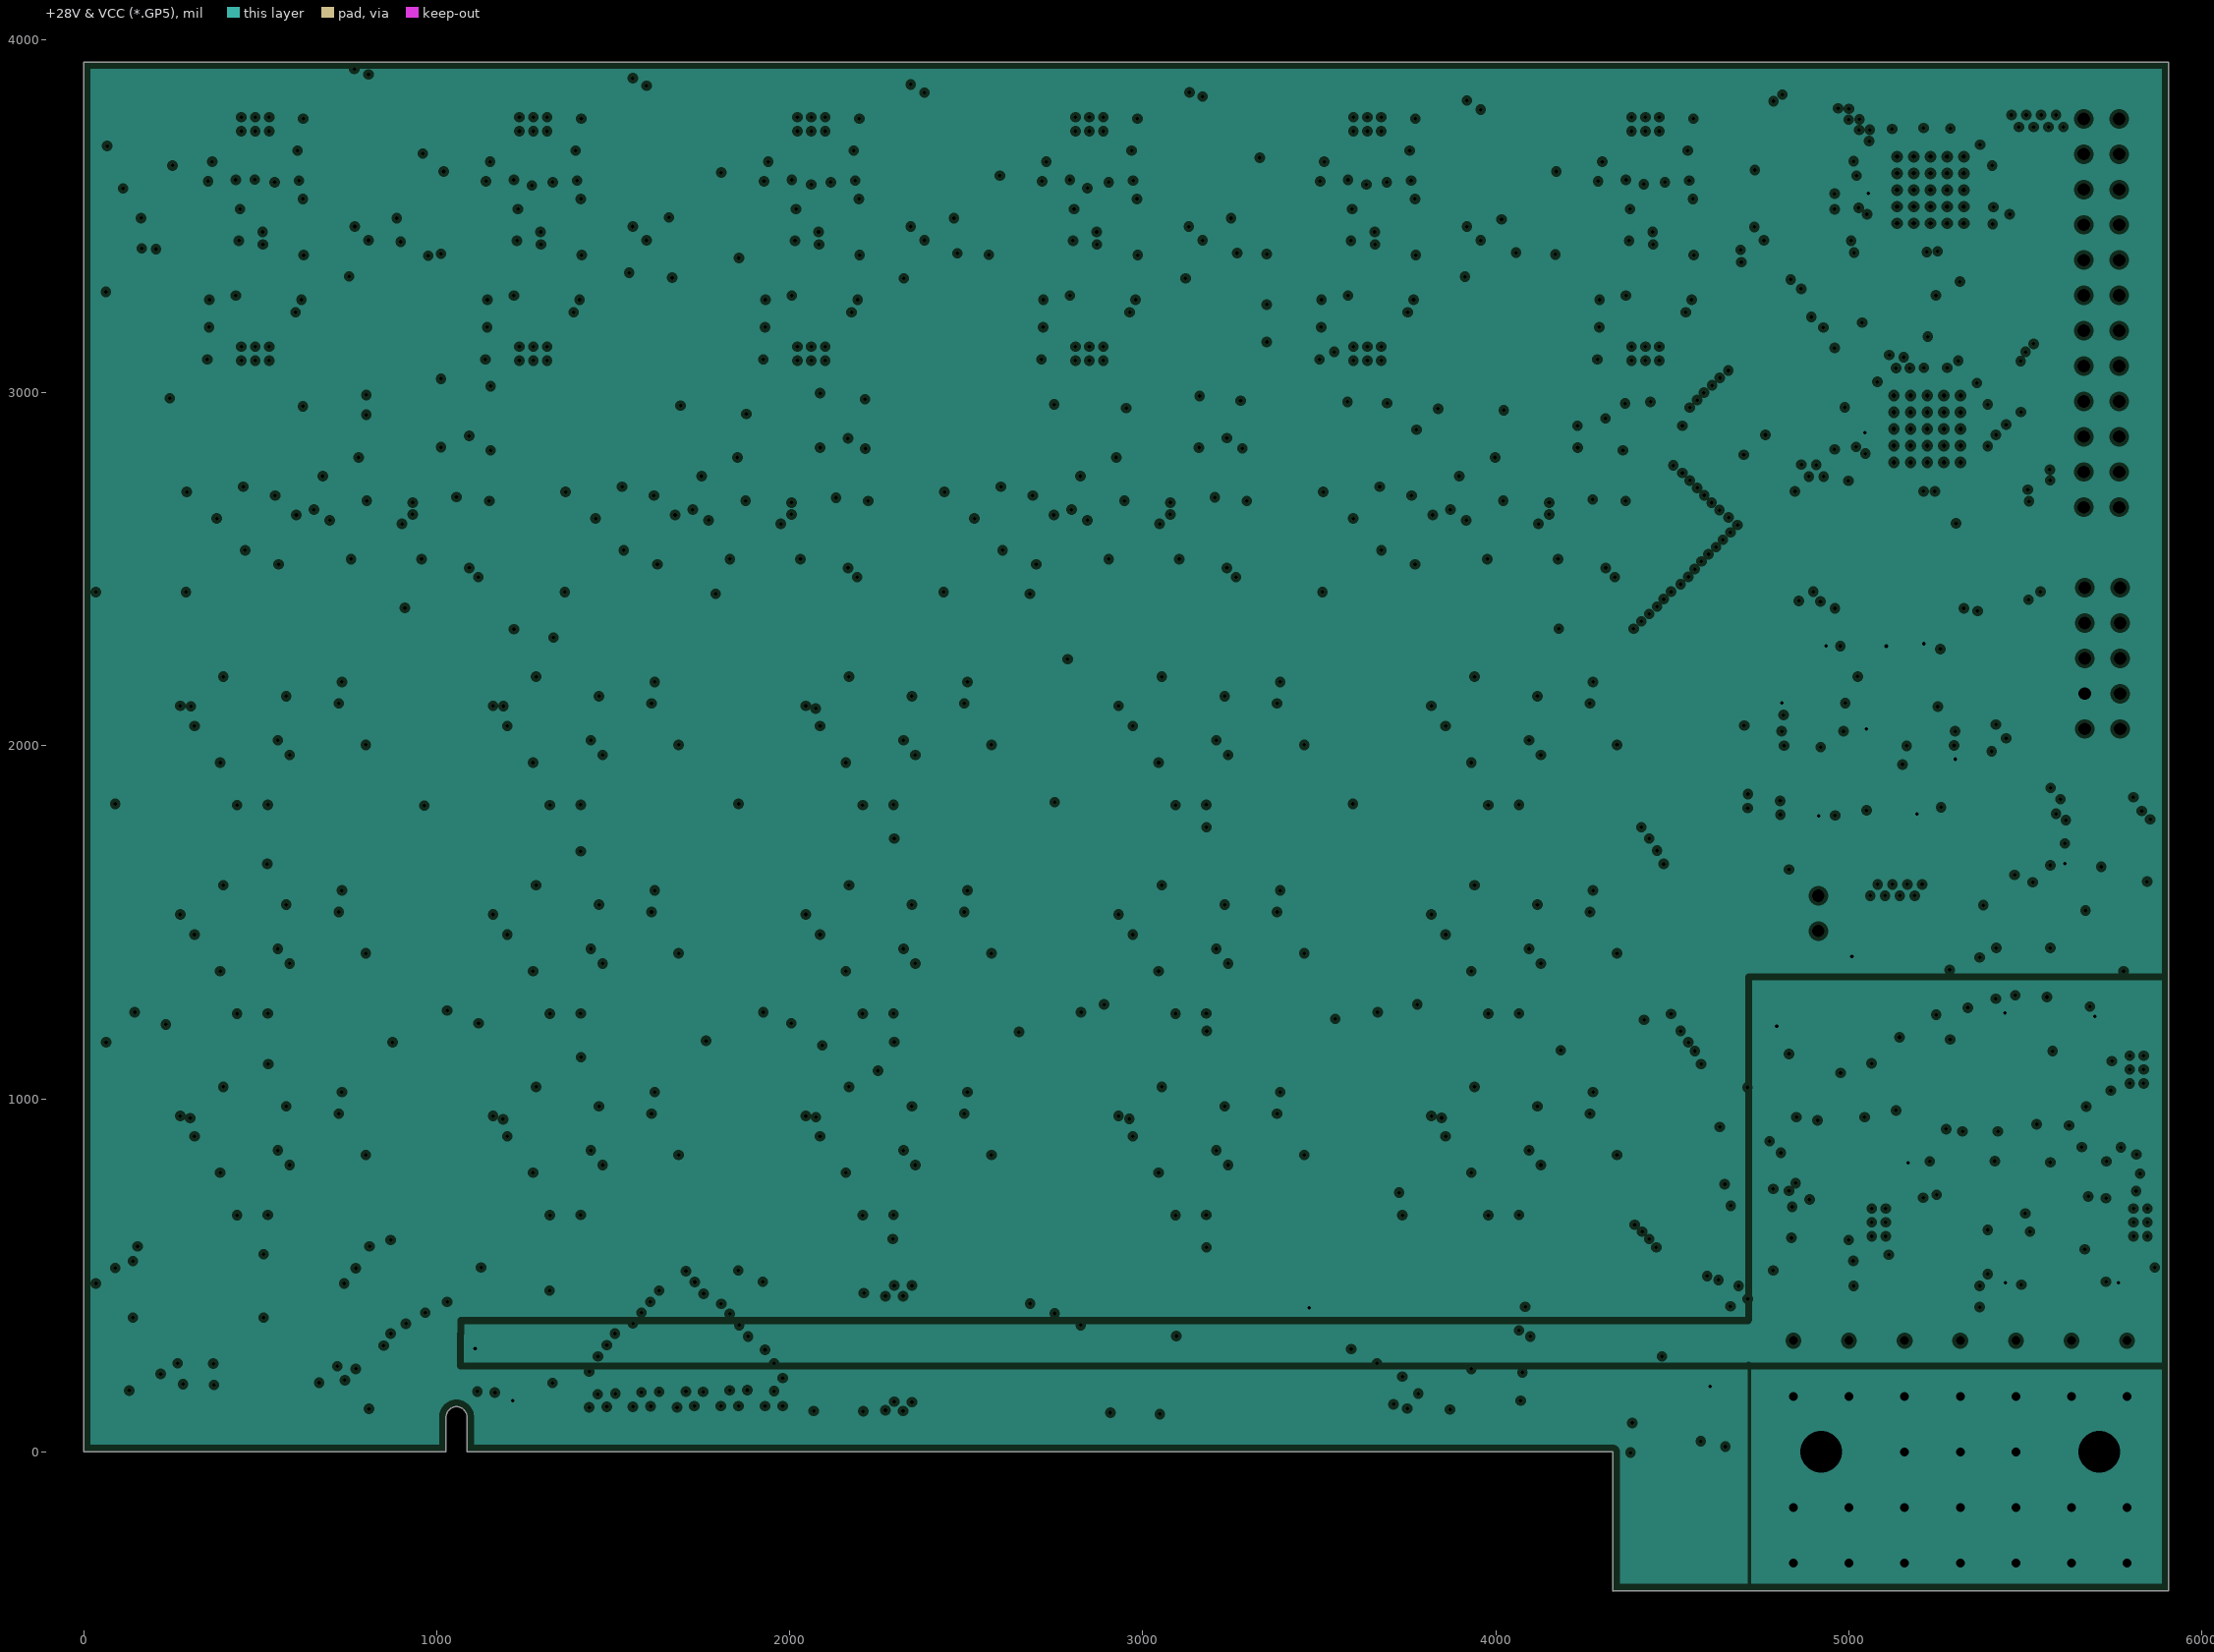
[diagram p7: +28V & VCC (*.GP5), clearances drawn from the general rule]
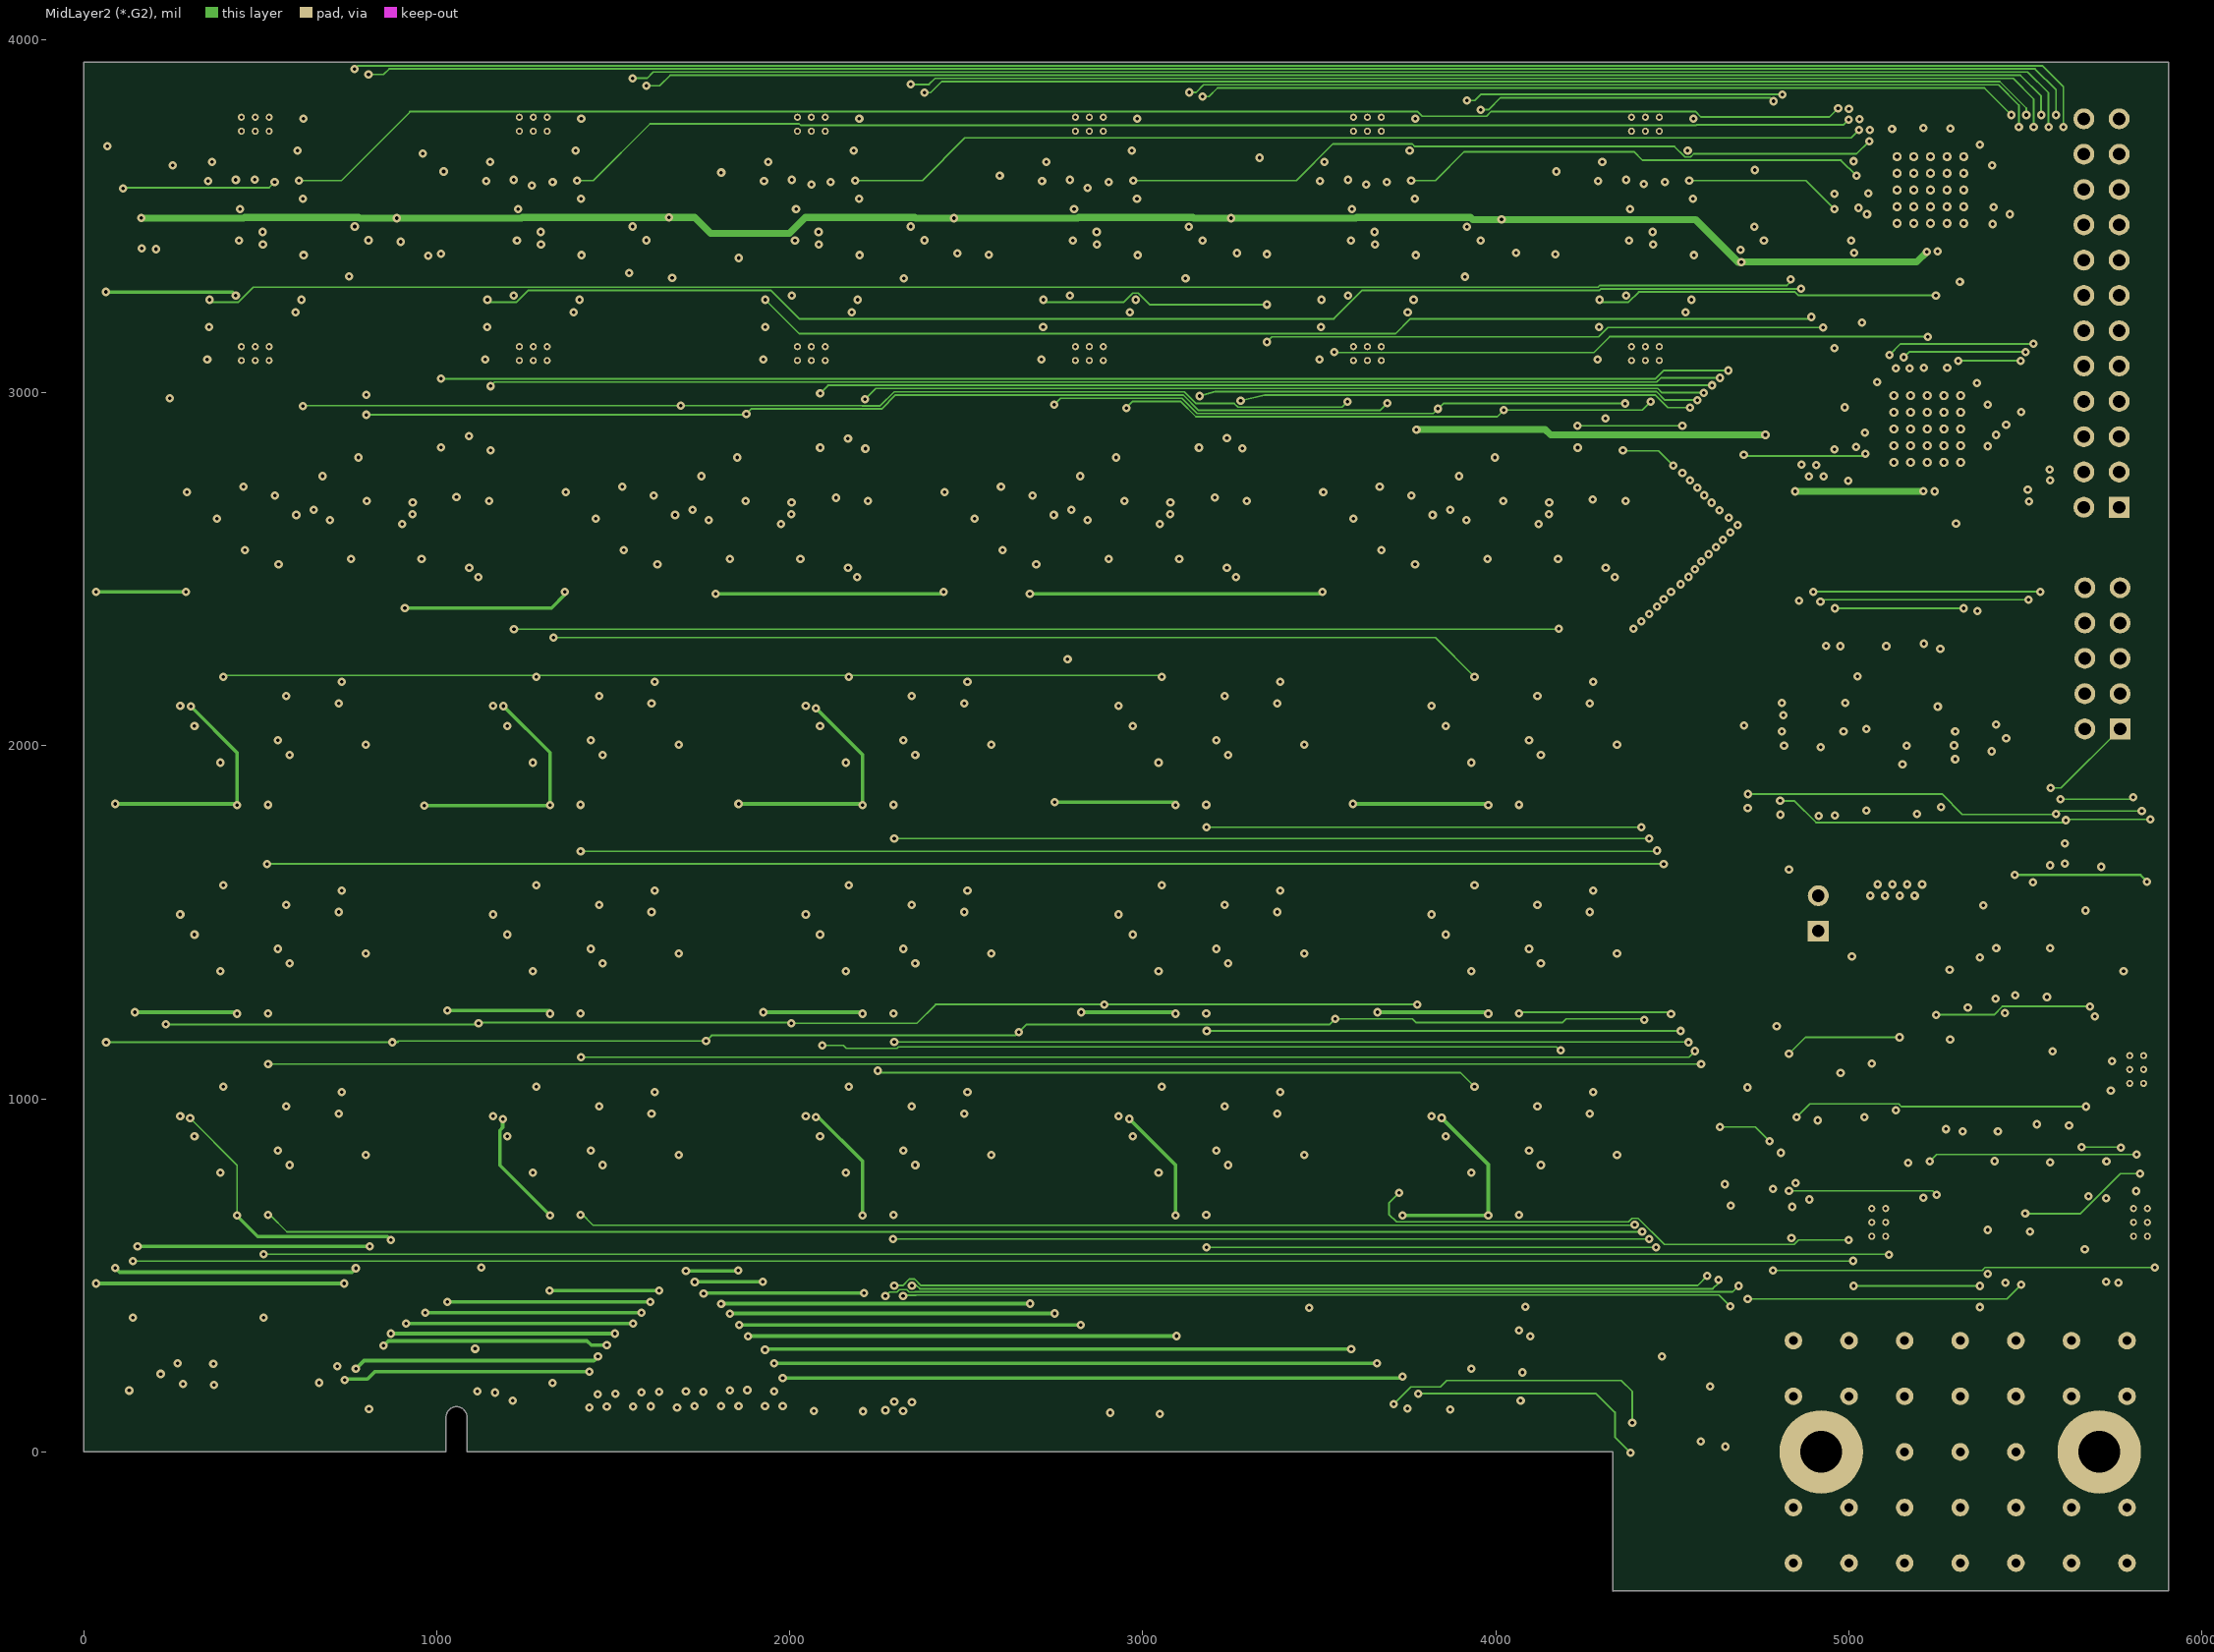
[diagram p8: MidLayer2 (*.G2)]
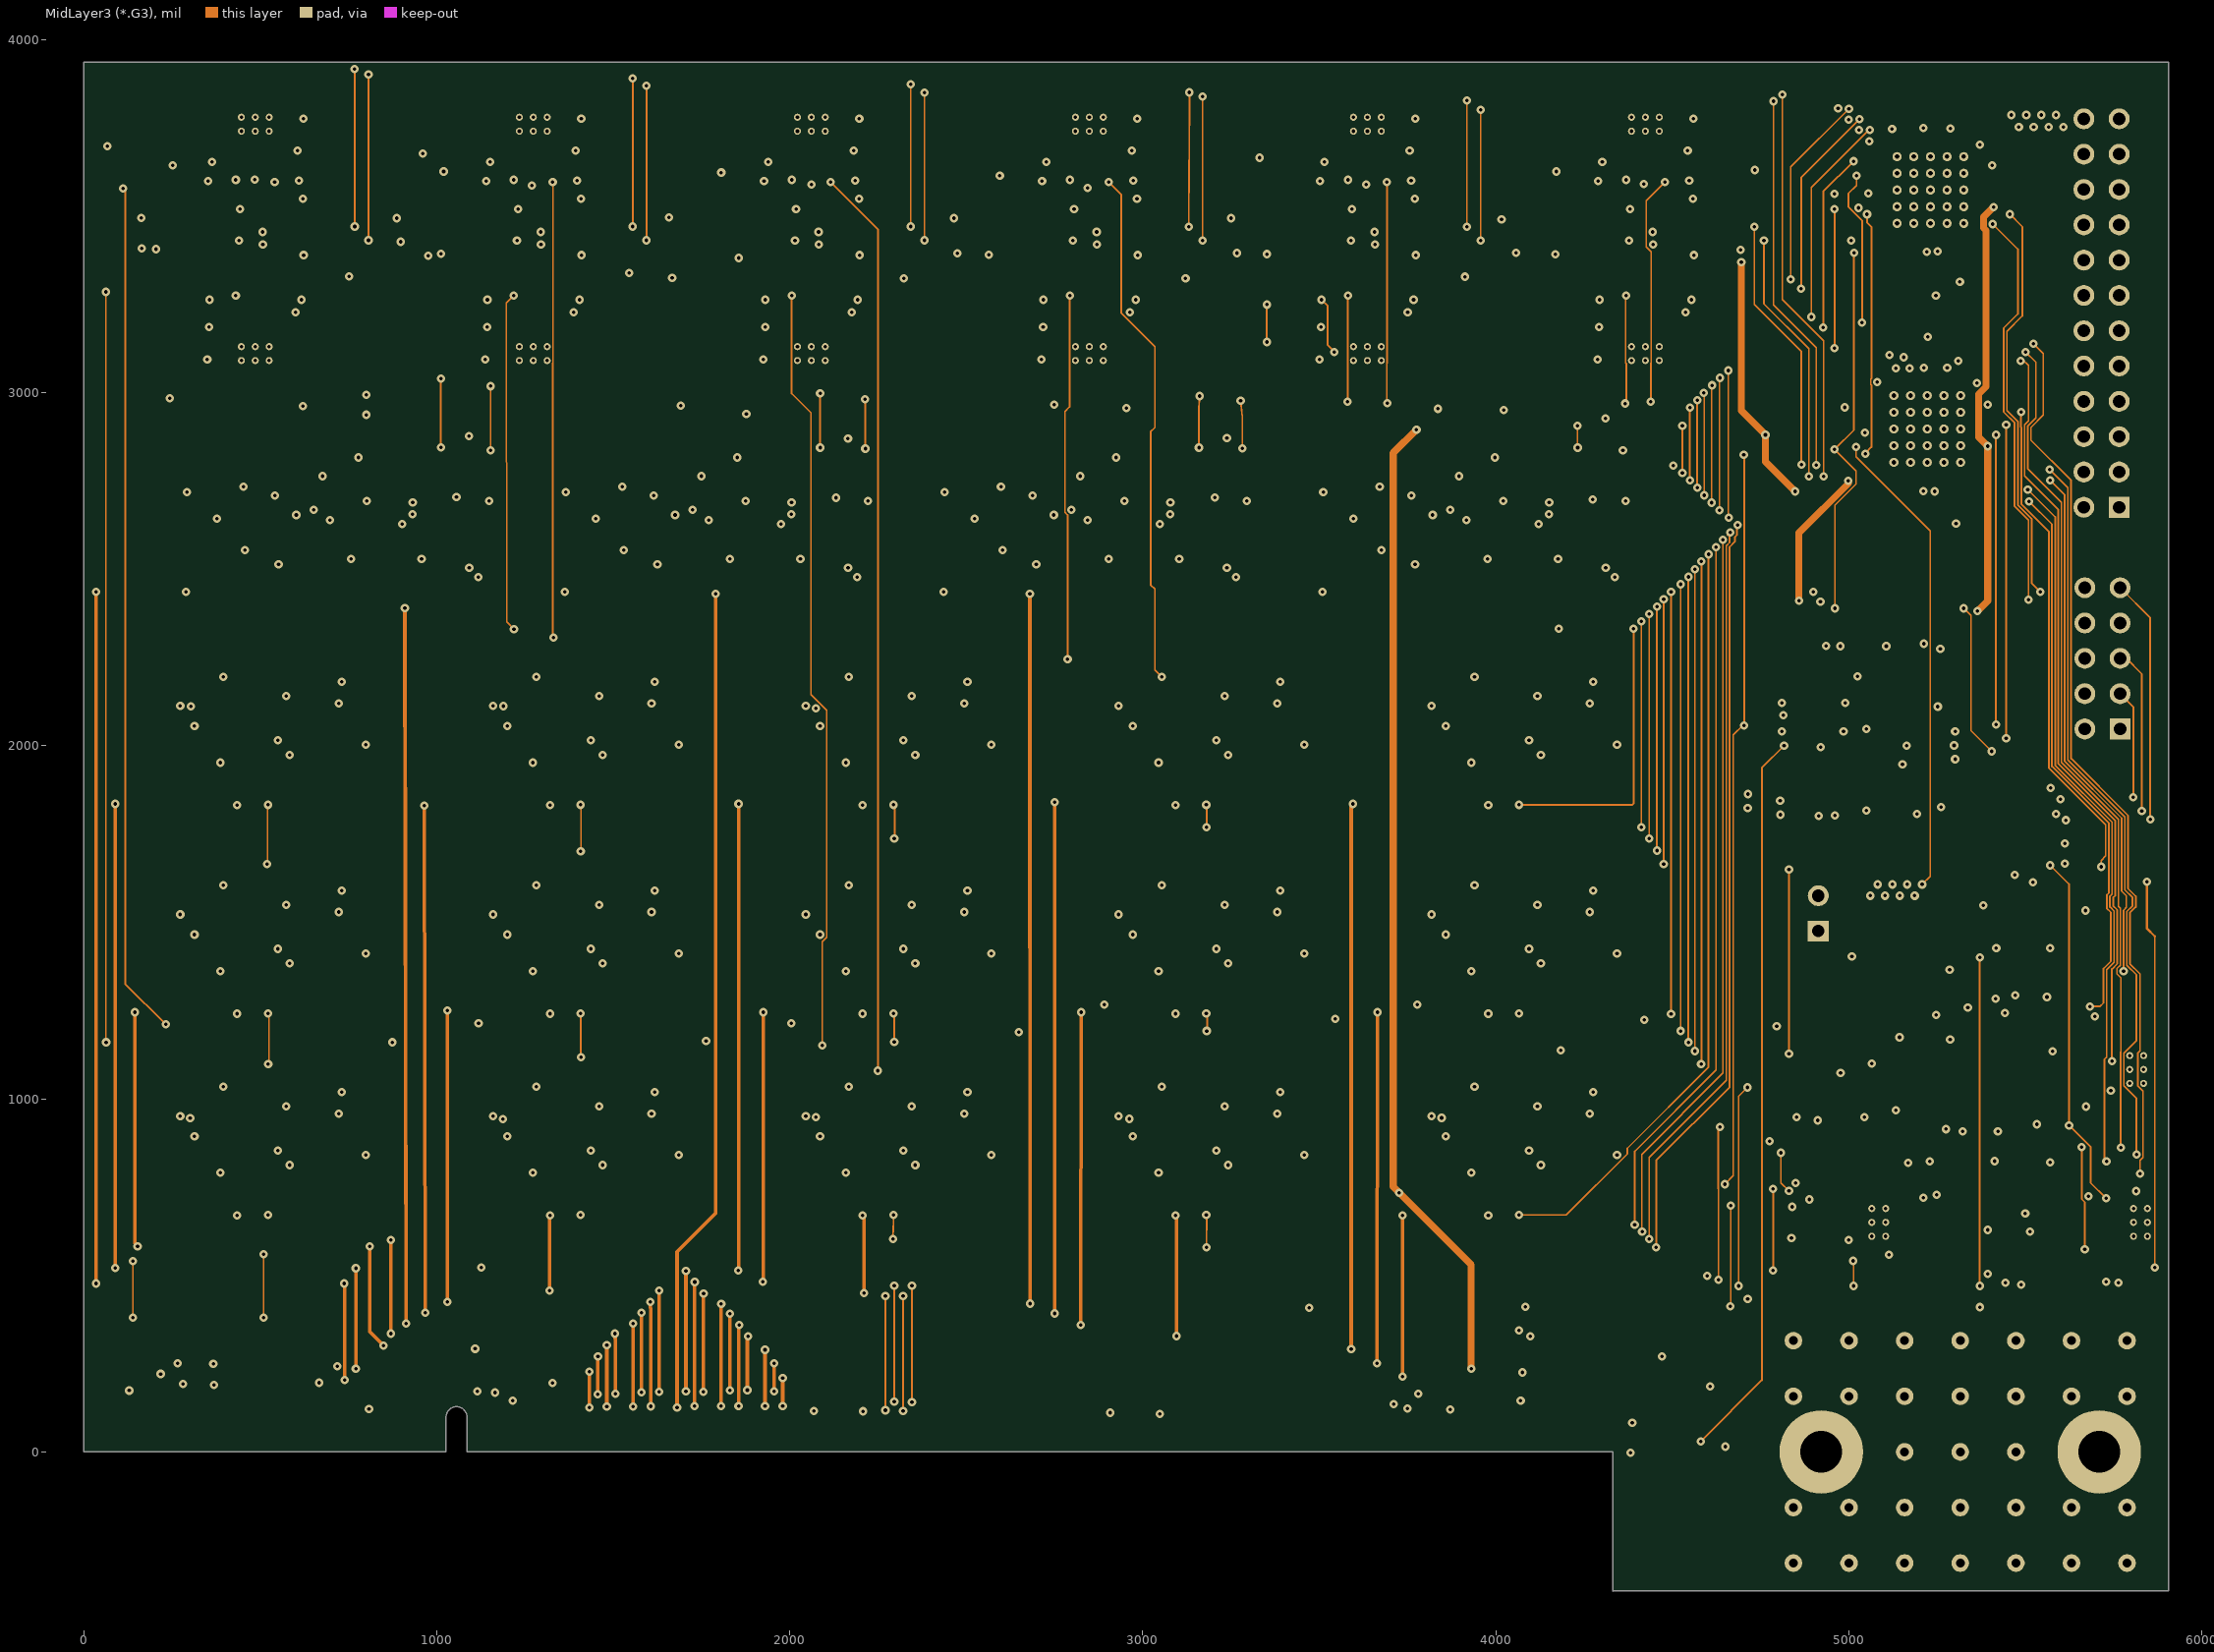
[diagram p9: MidLayer3 (*.G3)]

## Layer stack, top to bottom
Top Layer (.GTL): signal copper 1.4
Dielectric: prepreg 5, FR-4, Dk 4.8
MidLayer1 (*.G1): signal copper 1.4
Dielectric: core 5, FR-4, Dk 4.8
+12V (*.GP1): plane copper 2.8, net (Multiple Nets)
Dielectric: prepreg 5, FR-4, Dk 4.8
-12V (*.GP2): plane copper 2.8, net (Multiple Nets)
Dielectric: core 5, FR-4, Dk 4.8
A & GND (*.GP3): plane copper 2.8, net (Multiple Nets)
Dielectric: prepreg 5, FR-4, Dk 4.8
Chassis E (*.GP4): plane copper 2.8, net (Multiple Nets)
Dielectric: core 5, FR-4, Dk 4.8
+28V & VCC (*.GP5): plane copper 1.4, net (Multiple Nets)
Dielectric: prepreg 5, FR-4, Dk 4.8
MidLayer2 (*.G2): signal copper 1.4
Dielectric: core 5, FR-4, Dk 4.8
MidLayer3 (*.G3): signal copper 1.4
Dielectric: prepreg 5, FR-4, Dk 4.8
Bottom Layer (.GBL): signal copper 1.4

## Board outline
0,0 0,3936.2 5905.51,3936.2 5905.51,-393.7 4330.71,-393.7 4330.71,-394.51 4330.71,0 1086.61,0 1085.81,0.81 1085.81,98.43 ccw(c1056.28,98.43) 1026.75,98.43 1026.75,0

## Design rules (kind name [scope] priority, off if disabled: settings)
Clearance "MSOP pad spacing" [(HasFootprint('TQFP48_m') or HasFootprint('RM-8'))] p1: gap=6
Clearance [All] p2: gap=4
ComponentClearance ComponentClearance_1 [(InComponent('J1'))] p1: gap=0 collisioncheckmode=3 verticalgap=10 showdistances=FALSE
ComponentClearance "J1 clearance" [(HasFootprint('QMS EDGE PWR PINS'))] p2: gap=-393.7 collisioncheckmode=3 verticalgap=0 showdistances=FALSE
ComponentClearance [All] p3: gap=5 collisioncheckmode=3 verticalgap=10 showdistances=TRUE
FabricationTestPointUsage TestPointUsage [All] p1: valid=0 allowmultiple=FALSE
FabricationTestpoint Testpoint [(IsPad And (OnTopLayer Or OnBottomLayer))] p1: side=3 testpointundercomponent=TRUE minsize=40 maxsize=100 preferedsize=60 minholesize=20 maxholesize=40 preferedholesize=32 testpointgrid=1 allowsidetop=TRUE allowsidebottom=TRUE usegrid=TRUE gridtolerance=0.01
HoleSize [All] p1: absolutevalues=TRUE maxlimit=300 minlimit=1 maxpercent=80.000 minpercent=20.000
MinimumSolderMaskSliver [All] p1: minsoldermaskwidth=1
NetsToIgnore [InNet('E') And OnLayer('Chassis E')] p1:
PlaneClearance [All] p1: clearance=10
PlaneConnect PlaneConnect_1 [(InComponent('Q1*'))or(InComponent('Q2*')) Or (InComponent('U13')) or (InComponent('U16'))or(InComponent('Q3')) or(InComponent('Q4'))or(InComponent('Q5'))or (InNet(E))] p1: planeconnectstyle=Direct reliefexpansion=20 reliefentries=4 reliefconductorwidth=10 reliefairgap=10
PlaneConnect [All] p2: planeconnectstyle=Relief reliefexpansion=20 reliefentries=4 reliefconductorwidth=10 reliefairgap=10
PolygonConnect [All] p1: connectstyle=Relief reliefconductorwidth=10 reliefentries=4 polygonreliefangle="90 Angle"
RoomDefinition "CPLD board" [InComponentClass('CPLD board')] p1: confinementstyle=ConfineIn formatcopy=TRUE lockcomponents=FALSE outline -174,-397 6301.73,-397 6301.73,3773.49 -174,3773.49
RoomDefinition Analog [InComponentClass('Analog')] p2: confinementstyle=ConfineIn formatcopy=TRUE lockcomponents=FALSE outline 4963.73,2561.49 5824.73,2561.49 5824.73,3931.49 4963.73,3931.49
RoomDefinition "Bias Voltages" [InComponentClass('Bias Voltages')] p3: confinementstyle=ConfineIn formatcopy=TRUE lockcomponents=FALSE outline 63.73,60.49 7159.73,60.49 7159.73,1718.49 63.73,1718.49
RoomDefinition P3A [InComponentClass('P3A')] p4: confinementstyle=ConfineIn formatcopy=FALSE lockcomponents=FALSE outline 196.85,2411.42 1240.16,2411.42 1240.16,2883.8 196.85,2883.8
RoomDefinition SerialPhase7 [InComponentClass('SerialPhase7')] p5: confinementstyle=ConfineIn formatcopy=TRUE lockcomponents=TRUE outline 1082.68,1230.31 1801.18,1230.31 1801.18,1702.75 1082.68,1702.75
RoomDefinition SerialPhase11 [InComponentClass('SerialPhase11')] p6: confinementstyle=ConfineIn formatcopy=TRUE lockcomponents=TRUE outline 196.85,659.45 915.35,659.45 915.35,1131.89 196.85,1131.89
RoomDefinition SerialPhase6 [InComponentClass('SerialPhase6')] p7: confinementstyle=ConfineIn formatcopy=TRUE lockcomponents=TRUE outline 196.85,1230.31 915.35,1230.31 915.35,1702.75 196.85,1702.75
RoomDefinition RefAmps3 [InComponentClass('RefAmps3')] p8: confinementstyle=ConfineIn formatcopy=FALSE lockcomponents=FALSE outline 1679.73,3056.49 2290.73,3056.49 2290.73,3813.49 1679.73,3813.49
RoomDefinition TGA [InComponentClass('TGA')] p9: confinementstyle=ConfineIn formatcopy=TRUE lockcomponents=TRUE outline 2342.52,2411.42 3385.83,2411.42 3385.83,2883.8 2342.52,2883.8
RoomDefinition TGB [InComponentClass('TGB')] p10: confinementstyle=ConfineIn formatcopy=TRUE lockcomponents=TRUE outline 3415.35,2411.42 4458.66,2411.42 4458.66,2883.8 3415.35,2883.8
RoomDefinition P3B [InComponentClass('P3B')] p11: confinementstyle=ConfineIn formatcopy=FALSE lockcomponents=TRUE outline 1269.68,2411.42 2312.99,2411.42 2312.99,2883.8 1269.68,2883.8
RoomDefinition "Reset Gate" [InComponentClass('Reset Gate')] p12: confinementstyle=ConfineIn formatcopy=TRUE lockcomponents=FALSE outline 3740.16,1820.87 4458.66,1820.87 4458.66,2293.31 3740.16,2293.31
RoomDefinition PPhase1/22 [InComponentClass('PPhase1/22')] p13: confinementstyle=ConfineIn formatcopy=TRUE lockcomponents=FALSE outline 1082.68,1820.87 1801.18,1820.87 1801.18,2293.31 1082.68,2293.31
RoomDefinition SerialPhase14 [InComponentClass('SerialPhase14')] p14: confinementstyle=ConfineIn formatcopy=TRUE lockcomponents=FALSE outline 2854.33,659.45 3572.83,659.45 3572.83,1131.89 2854.33,1131.89
RoomDefinition SerialPhase8 [InComponentClass('SerialPhase8')] p15: confinementstyle=ConfineIn formatcopy=TRUE lockcomponents=FALSE outline 1968.5,1230.31 2687.01,1230.31 2687.01,1702.75 1968.5,1702.75
RoomDefinition "Summing Gate" [InComponentClass('Summing Gate')] p16: confinementstyle=ConfineIn formatcopy=TRUE lockcomponents=FALSE outline 3740.16,659.45 4458.66,659.45 4458.66,1131.89 3740.16,1131.89
RoomDefinition SerialPhase13 [InComponentClass('SerialPhase13')] p17: confinementstyle=ConfineIn formatcopy=TRUE lockcomponents=FALSE outline 1968.5,659.45 2687.01,659.45 2687.01,1131.89 1968.5,1131.89
RoomDefinition SerialPhase12 [InComponentClass('SerialPhase12')] p18: confinementstyle=ConfineIn formatcopy=TRUE lockcomponents=FALSE outline 1082.68,659.45 1801.18,659.45 1801.18,1131.89 1082.68,1131.89
RoomDefinition SerialPhase10 [InComponentClass('SerialPhase10')] p19: confinementstyle=ConfineIn formatcopy=TRUE lockcomponents=FALSE outline 3740.16,1230.31 4458.66,1230.31 4458.66,1702.75 3740.16,1702.75
RoomDefinition SerialPhase9 [InComponentClass('SerialPhase9')] p20: confinementstyle=ConfineIn formatcopy=TRUE lockcomponents=FALSE outline 2854.33,1230.31 3572.83,1230.31 3572.83,1702.75 2854.33,1702.75
RoomDefinition PPhase1/24 [InComponentClass('PPhase1/24')] p21: confinementstyle=ConfineIn formatcopy=TRUE lockcomponents=FALSE outline 2854.33,1820.87 3572.83,1820.87 3572.83,2293.31 2854.33,2293.31
RoomDefinition PPhase1/23 [InComponentClass('PPhase1/23')] p22: confinementstyle=ConfineIn formatcopy=TRUE lockcomponents=FALSE outline 1968.5,1820.87 2687.01,1820.87 2687.01,2293.31 1968.5,2293.31
RoomDefinition PPhase1/21 [InComponentClass('PPhase1/21')] p23: confinementstyle=ConfineIn formatcopy=TRUE lockcomponents=TRUE outline 196.85,1820.87 915.35,1820.87 915.35,2293.31 196.85,2293.31
RoomDefinition RefAmps4 [InComponentClass('RefAmps4')] p24: confinementstyle=ConfineIn formatcopy=TRUE lockcomponents=FALSE outline 2467.73,3056.49 3077.73,3056.49 3077.73,3813.49 2467.73,3813.49
RoomDefinition RefAmps1 [InComponentClass('RefAmps1')] p25: confinementstyle=ConfineIn formatcopy=FALSE lockcomponents=FALSE outline 40.73,3056.49 715.73,3056.49 715.73,3813.49 40.73,3813.49
RoomDefinition RefAmps5 [InComponentClass('RefAmps5')] p26: confinementstyle=ConfineIn formatcopy=TRUE lockcomponents=FALSE outline 3254.73,3056.49 3865.73,3056.49 3865.73,3813.49 3254.73,3813.49
RoomDefinition RefAmps2 [InComponentClass('RefAmps2')] p27: confinementstyle=ConfineIn formatcopy=FALSE lockcomponents=FALSE outline 892.73,3056.49 1502.73,3056.49 1502.73,3813.49 892.73,3813.49
RoomDefinition RefAmps6 [InComponentClass('RefAmps6')] p28: confinementstyle=ConfineIn formatcopy=TRUE lockcomponents=FALSE outline 4041.73,3056.49 4652.73,3056.49 4652.73,3813.49 4041.73,3813.49
RoutingVias [All] p1: holewidth=10 width=24 viastyle="Through Hole" minholewidth=10 minwidth=24 maxholewidth=10 maxwidth=24
SilkToSilkClearance [All] p1: silktosilkclearance=3
SilkscreenOverComponentPads [All] p1: minsilkscreentomaskgap=3
SolderMaskExpansion [All] p1: expansion=2
Width Width_1 [All] p1: maxlimit=50 minlimit=5 preferedwidth=5
Width [All] p2: maxlimit=50 minlimit=5 preferedwidth=10
Width "Analog power" [(InNet('-5ANA') OR InNet('+5ANA') OR InNet(A)or InNet('+24V'))] p3: maxlimit=15 minlimit=15 preferedwidth=15
Width "+5V/DGND trace" [(InNet('+5') OR InNet('D'))] p4: maxlimit=50 minlimit=10 preferedwidth=50 midlayer1_minwidth=50 midlayer2_minwidth=50 midlayer3_minwidth=50 bottomlayer_minwidth=50 minimp=50.000000 maximp=50.000000 favimp=50.000000
19 further rules are at their usual default settings.

## Classes and differential pairs
component class SerialPhase14: C1N C2N C3N C4N L1N L2N R1N R2N TP3N U1N U2N U3N
component class SerialPhase13: C1M C2M C3M C4M L1M L2M R1M R2M TP3M U1M U2M U3M
component class SerialPhase8: C1H C2H C3H C4H L1H L2H R1H R2H TP3H U1H U2H U3H
component class PPhase1/22: C1B C2B C3B C4B L1B L2B R1B R2B TP3B U1B U2B U3B
component class Analog: C33 C34 C35 C36 P3 U13 U16
component class "Bias Voltages": C22 C25 C27 C28 C29 C30 C38 C39 C40 C41 C42 C43 C45 C46 C47 C48 C49 K1 Q3 Q4 Q5 Q7 R15 R16 R18 R19 R21 R22 R24 R25 R26 R27 R28 R29 R30 R31 R32 R33 R34 R35 R36 R37 R38 R39 R40 R41 R42 R43 R44 R45 R46 R47 R48 R49 R50 R51 R52 TP5 TP6 TP7 TP8 TP9 TP10 U11 U12 U14 U15 U18
component class "CPLD board": C7 C12 C16 C17 C18 C19 C20 C21 C23 C24 C26 C31 C32 C53 C54 C55 C56 C57 C58 C59 J1 L5 P1 P2 Q6 R11 RN1 TP11 TP12 TP13 TP14 TP15 TP16 TP17 TP18 TP19 TP20 TP21 U9 U10 U19
component class P3A: C5A C6A C8A C37A D1A D2A L3A L4A R3A R4A R5A R6A TP4A U4A U5A U6A U7A
component class P3B: C5B C6B C8B C37B D1B D2B L3B L4B R3B R4B R5B R6B TP4B U4B U5B U6B U7B
component class PPhase1/21: C1A C2A C3A C4A L1A L2A R1A R2A TP3A U1A U2A U3A
component class RefAmps1: C9A C10A C11A C13A C14A C15A C44A Q1A Q2A R7A R8A R9A R10A R12A R13A R14A R17A R20A R23A TP1A TP2A U8A U20A
component class RefAmps2: C9B C10B C11B C13B C14B C15B C44B Q1B Q2B R7B R8B R9B R10B R12B R13B R14B R17B R20B R23B TP1B TP2B U8B U20B
component class RefAmps3: C9C C10C C11C C13C C14C C15C C44C Q1C Q2C R7C R8C R9C R10C R12C R13C R14C R17C R20C R23C TP1C TP2C U8C U20C
component class RefAmps4: C9D C10D C11D C13D C14D C15D C44D Q1D Q2D R7D R8D R9D R10D R12D R13D R14D R17D R20D R23D TP1D TP2D U8D U20D
component class RefAmps5: C9E C10E C11E C13E C14E C15E C44E Q1E Q2E R7E R8E R9E R10E R12E R13E R14E R17E R20E R23E TP1E TP2E U8E U20E
component class RefAmps6: C9F C10F C11F C13F C14F C15F C44F Q1F Q2F R7F R8F R9F R10F R12F R13F R14F R17F R20F R23F TP1F TP2F U8F U20F
component class "Reset Gate": C1E C2E C3E C4E L1E L2E R1E R2E TP3E U1E U2E U3E
component class PPhase1/23: C1C C2C C3C C4C L1C L2C R1C R2C TP3C U1C U2C U3C
component class PPhase1/24: C1D C2D C3D C4D L1D L2D R1D R2D TP3D U1D U2D U3D
component class SerialPhase9: C1I C2I C3I C4I L1I L2I R1I R2I TP3I U1I U2I U3I
component class SerialPhase10: C1J C2J C3J C4J L1J L2J R1J R2J TP3J U1J U2J U3J
component class SerialPhase11: C1K C2K C3K C4K L1K L2K R1K R2K TP3K U1K U2K U3K
component class SerialPhase12: C1L C2L C3L C4L L1L L2L R1L R2L TP3L U1L U2L U3L
component class SerialPhase7: C1G C2G C3G C4G L1G L2G R1G R2G TP3G U1G U2G U3G
component class SerialPhase6: C1F C2F C3F C4F L1F L2F R1F R2F TP3F U1F U2F U3F
component class "Summing Gate": C1O C2O C3O C4O L1O L2O R1O R2O TP3O U1O U2O U3O
component class TGA: C5C C6C C8C C37C D1C D2C L3C L4C R3C R4C R5C R6C TP4C U4C U5C U6C U7C
component class TGB: C5D C6D C8D C37D D1D D2D L3D L4D R3D R4D R5D R6D TP4D U4D U5D U6D U7D
net class CDO[19..1]: CDO1 CDO2 CDO3 CDO4 CDO5 CDO6 CDO7 CDO8 CDO9 CDO10 CDO11 CDO12 CDO13 CDO14 CDO15 CDO16 CDO17 CDO18 CDO19
net class DAC_HI[6..1]: DAC_HI1 DAC_HI2 DAC_HI3 DAC_HI4 DAC_HI5 DAC_HI6
net class DAC_LO[6..1]: DAC_LO1 DAC_LO2 DAC_LO3 DAC_LO4 DAC_LO5 DAC_LO6
net class MON_HI[1..6]: MON_HI1 MON_HI2 MON_HI3 MON_HI4 MON_HI5 MON_HI6
net class MON_LO[1..6]: MON_LO1 MON_LO2 MON_LO3 MON_LO4 MON_LO5 MON_LO6
net class PH_CLK[23..1]: PH_CLK1 PH_CLK2 PH_CLK3 PH_CLK4 PH_CLK5 PH_CLK6 PH_CLK7 PH_CLK8 PH_CLK9 PH_CLK10 PH_CLK11 PH_CLK12 PH_CLK13 PH_CLK14 PH_CLK15 PH_CLK16 PH_CLK17 PH_CLK18 PH_CLK19 PH_CLK20 PH_CLK21 PH_CLK22 PH_CLK23
net class VREFHI[6..1]: VREFHI1 VREFHI2 VREFHI3 VREFHI4 VREFHI5 VREFHI6
net class VREFLO[6..1]: VREFLO1 VREFLO2 VREFLO3 VREFLO4 VREFLO5 VREFLO6
channel class "Sinistro_Clk_31_Rev 4": RefAmps1 RefAmps2 RefAmps3 RefAmps4 RefAmps5 RefAmps6
channel class "Sinistro_Clk_32_Rev 4": PPhase1/21 PPhase1/22 PPhase1/23 PPhase1/24 "Reset Gate" SerialPhase6 SerialPhase7 SerialPhase8 SerialPhase9 SerialPhase10 SerialPhase11 SerialPhase12 SerialPhase13 SerialPhase14 "Summing Gate"
channel class Sinistro_Clk_33_Rev4: P3A P3B TGA TGB

## Components (designator, comment, footprint, x,y, rotation, side; value= is the part's Value field where it differs from the comment)
C1A "35V" SMD_CAP_7343 309.37,2055.39 r270 bottom (schematic designator C1)
C1B "35V" SMD_CAP_7343 1195.2,2055.39 r270 bottom (schematic designator C1)
C1C "35V" SMD_CAP_7343 2081.02,2055.39 r270 bottom (schematic designator C1)
C1D "35V" SMD_CAP_7343 2966.85,2055.39 r270 bottom (schematic designator C1)
C1E "35V" SMD_CAP_7343 3852.68,2055.39 r270 bottom (schematic designator C1)
C1F "35V" SMD_CAP_7343 309.37,1464.84 r270 bottom (schematic designator C1)
C1G "35V" SMD_CAP_7343 1195.2,1464.84 r270 bottom (schematic designator C1)
C1H "35V" SMD_CAP_7343 2081.02,1464.84 r270 bottom (schematic designator C1)
C1I "35V" SMD_CAP_7343 2966.85,1464.84 r270 bottom (schematic designator C1)
C1J "35V" SMD_CAP_7343 3852.68,1464.84 r270 bottom (schematic designator C1)
C1K "35V" SMD_CAP_7343 309.37,893.98 r270 bottom (schematic designator C1)
C1L "35V" SMD_CAP_7343 1195.2,893.98 r270 bottom (schematic designator C1)
C1M "35V" SMD_CAP_7343 2081.02,893.98 r270 bottom (schematic designator C1)
C1N "35V" SMD_CAP_7343 2966.85,893.98 r270 bottom (schematic designator C1)
C1O "35V" SMD_CAP_7343 3852.68,893.98 r270 bottom (schematic designator C1)
C2A "Cap SMD" SMD_0805 516.06,2153.82 r90 top (schematic designator C2)
C2B "Cap SMD" SMD_0805 1401.89,2153.82 r90 top (schematic designator C2)
C2C "Cap SMD" SMD_0805 2287.72,2153.82 r90 top (schematic designator C2)
C2D "Cap SMD" SMD_0805 3173.54,2153.82 r90 top (schematic designator C2)
C2E "Cap SMD" SMD_0805 4059.37,2153.82 r90 top (schematic designator C2)
C2F "Cap SMD" SMD_0805 516.06,1563.27 r90 top (schematic designator C2)
C2G "Cap SMD" SMD_0805 1401.89,1563.27 r90 top (schematic designator C2)
C2H "Cap SMD" SMD_0805 2287.72,1563.27 r90 top (schematic designator C2)
C2I "Cap SMD" SMD_0805 3173.54,1563.27 r90 top (schematic designator C2)
C2J "Cap SMD" SMD_0805 4059.37,1563.27 r90 top (schematic designator C2)
C2K "Cap SMD" SMD_0805 516.06,992.4 r90 top (schematic designator C2)
C2L "Cap SMD" SMD_0805 1401.89,992.4 r90 top (schematic designator C2)
C2M "Cap SMD" SMD_0805 2287.72,992.4 r90 top (schematic designator C2)
C2N "Cap SMD" SMD_0805 3173.54,992.4 r90 top (schematic designator C2)
C2O "Cap SMD" SMD_0805 4059.37,992.4 r90 top (schematic designator C2)
C3A "35V" SMD_CAP_7343 801.49,2055.39 r90 bottom (schematic designator C3)
C3B "35V" SMD_CAP_7343 1687.32,2055.39 r90 bottom (schematic designator C3)
C3C "35V" SMD_CAP_7343 2573.15,2055.39 r90 bottom (schematic designator C3)
C3D "35V" SMD_CAP_7343 3458.98,2055.39 r90 bottom (schematic designator C3)
C3E "35V" SMD_CAP_7343 4344.8,2055.39 r90 bottom (schematic designator C3)
C3F "35V" SMD_CAP_7343 801.5,1464.84 r90 bottom (schematic designator C3)
C3G "35V" SMD_CAP_7343 1687.32,1464.84 r90 bottom (schematic designator C3)
C3H "35V" SMD_CAP_7343 2573.15,1464.84 r90 bottom (schematic designator C3)
C3I "35V" SMD_CAP_7343 3458.98,1464.84 r90 bottom (schematic designator C3)
C3J "35V" SMD_CAP_7343 4344.8,1464.84 r90 bottom (schematic designator C3)
C3K "35V" SMD_CAP_7343 801.5,893.98 r90 bottom (schematic designator C3)
C3L "35V" SMD_CAP_7343 1687.32,893.98 r90 bottom (schematic designator C3)
C3M "35V" SMD_CAP_7343 2573.15,893.98 r90 bottom (schematic designator C3)
C3N "35V" SMD_CAP_7343 3458.98,893.98 r90 bottom (schematic designator C3)
C3O "35V" SMD_CAP_7343 4344.8,893.98 r90 bottom (schematic designator C3)
C4A "Cap SMD" SMD_0805 437.32,2153.82 r90 top (schematic designator C4)
C4B "Cap SMD" SMD_0805 1323.15,2153.82 r90 top (schematic designator C4)
C4C "Cap SMD" SMD_0805 2208.98,2153.82 r90 top (schematic designator C4)
C4D "Cap SMD" SMD_0805 3094.8,2153.82 r90 top (schematic designator C4)
C4E "Cap SMD" SMD_0805 3980.63,2153.82 r90 top (schematic designator C4)
C4F "Cap SMD" SMD_0805 437.32,1563.27 r90 top (schematic designator C4)
C4G "Cap SMD" SMD_0805 1323.15,1563.27 r90 top (schematic designator C4)
C4H "Cap SMD" SMD_0805 2208.98,1563.27 r90 top (schematic designator C4)
C4I "Cap SMD" SMD_0805 3094.8,1563.27 r90 top (schematic designator C4)
C4J "Cap SMD" SMD_0805 3980.63,1563.27 r90 top (schematic designator C4)
C4K "Cap SMD" SMD_0805 437.32,992.4 r90 top (schematic designator C4)
C4L "Cap SMD" SMD_0805 1323.15,992.4 r90 top (schematic designator C4)
C4M "Cap SMD" SMD_0805 2208.98,992.4 r90 top (schematic designator C4)
C4N "Cap SMD" SMD_0805 3094.8,992.4 r90 top (schematic designator C4)
C4O "Cap SMD" SMD_0805 3980.63,992.4 r90 top (schematic designator C4)
C5A "35V" SMD_CAP_7343 857.4,2653.31 r90 bottom (schematic designator C5)
C5B "35V" SMD_CAP_7343 1930.24,2653.31 r90 bottom (schematic designator C5)
C5C "35V" SMD_CAP_7343 3003.07,2653.31 r90 bottom (schematic designator C5)
C5D "35V" SMD_CAP_7343 4075.91,2653.31 r90 bottom (schematic designator C5)
C6A "Cap SMD" SMD_0805 497.4,2753.31 r90 top (schematic designator C6)
C6B "Cap SMD" SMD_0805 1570.24,2753.31 r90 top (schematic designator C6)
C6C "Cap SMD" SMD_0805 2643.07,2753.31 r90 top (schematic designator C6)
C6D "Cap SMD" SMD_0805 3715.9,2753.31 r90 top (schematic designator C6)
C7 "15V" SMD_CAP_3216 4650,130 r90 top
C8A "35V" SMD_CAP_7343 357.4,2653.31 r90 bottom (schematic designator C8)
C8B "35V" SMD_CAP_7343 1430.24,2653.31 r90 bottom (schematic designator C8)
C8C "35V" SMD_CAP_7343 2503.07,2653.31 r90 bottom (schematic designator C8)
C8D "35V" SMD_CAP_7343 3575.91,2653.31 r90 bottom (schematic designator C8)
C9A "Cap SMD" SMD_0805 673.31,3730.32 r270 bottom (schematic designator C9)
C9B "Cap SMD" SMD_0805 1460.71,3730.31 r270 bottom (schematic designator C9)
C9C "Cap SMD" SMD_0805 2248.11,3730.32 r270 bottom (schematic designator C9)
C9D "Cap SMD" SMD_0805 3035.51,3730.32 r270 bottom (schematic designator C9)
C9E "Cap SMD" SMD_0805 3822.91,3730.31 r270 bottom (schematic designator C9)
C9F "Cap SMD" SMD_0805 4610.31,3730.32 r270 bottom (schematic designator C9)
C10A "Cap SMD" SMD_0805 300.7,3474.41 r270 bottom (schematic designator C10)
C10B "Cap SMD" SMD_0805 1088.11,3474.41 r270 bottom (schematic designator C10)
C10C "Cap SMD" SMD_0805 1875.51,3474.41 r270 bottom (schematic designator C10)
C10D "Cap SMD" SMD_0805 2662.91,3474.41 r270 bottom (schematic designator C10)
C10E "Cap SMD" SMD_0805 3450.31,3474.41 r270 bottom (schematic designator C10)
C10F "Cap SMD" SMD_0805 4237.71,3474.41 r270 bottom (schematic designator C10)
C11A "Cap SMD" SMD_0805 299.29,3139.76 r270 bottom (schematic designator C11)
C11B "Cap SMD" SMD_0805 1086.69,3139.76 r270 bottom (schematic designator C11)
C11C "Cap SMD" SMD_0805 1874.09,3139.76 r270 bottom (schematic designator C11)
C11D "Cap SMD" SMD_0805 2661.5,3139.76 r270 bottom (schematic designator C11)
C11E "Cap SMD" SMD_0805 3448.9,3139.76 r270 bottom (schematic designator C11)
C11F "Cap SMD" SMD_0805 4236.3,3139.76 r270 bottom (schematic designator C11)
C12 "Cap SMD" SMD_0805 4515,225 r0 top
C13A "15V" SMD_CAP_3216 486.3,3641.73 r0 bottom (schematic designator C13)
C13B "15V" SMD_CAP_3216 1273.7,3641.73 r0 bottom (schematic designator C13)
C13C "15V" SMD_CAP_3216 2061.1,3641.73 r0 bottom (schematic designator C13)
C13D "15V" SMD_CAP_3216 2848.5,3641.73 r0 bottom (schematic designator C13)
C13E "15V" SMD_CAP_3216 3635.9,3641.73 r0 bottom (schematic designator C13)
C13F "15V" SMD_CAP_3216 4423.31,3641.73 r0 bottom (schematic designator C13)
C14A "15V" SMD_CAP_3216 486.3,3228.35 r0 bottom (schematic designator C14)
C14B "15V" SMD_CAP_3216 1273.7,3228.35 r0 bottom (schematic designator C14)
C14C "15V" SMD_CAP_3216 2061.1,3228.35 r0 bottom (schematic designator C14)
C14D "15V" SMD_CAP_3216 2848.5,3228.35 r0 bottom (schematic designator C14)
C14E "15V" SMD_CAP_3216 3635.9,3228.35 r0 bottom (schematic designator C14)
C14F "15V" SMD_CAP_3216 4423.31,3228.35 r0 bottom (schematic designator C14)
C15A "Cap SMD" SMD_0805 664.88,3385.83 r90 bottom (schematic designator C15)
C15B "Cap SMD" SMD_0805 1452.28,3385.83 r90 bottom (schematic designator C15)
C15C "Cap SMD" SMD_0805 2239.68,3385.83 r90 bottom (schematic designator C15)
C15D "Cap SMD" SMD_0805 3027.08,3385.83 r90 bottom (schematic designator C15)
C15E "Cap SMD" SMD_0805 3814.48,3385.83 r90 bottom (schematic designator C15)
C15F "Cap SMD" SMD_0805 4601.89,3385.83 r90 bottom (schematic designator C15)
C16 "Cap SMD" SMD_0805 4515,160 r0 top
C17 "Cap SMD" SMD_0805 5709,1722.71 r0 top
C18 "Cap SMD" SMD_0805 4919.41,1905.63 r270 bottom
C19 "Cap SMD" SMD_0805 4899.41,2120.63 r180 bottom
C20 "Cap SMD" SMD_0805 5194.41,1900.63 r270 bottom
C21 "Cap SMD" SMD_0805 5209.41,2200.63 r90 bottom
C22 "Cap SMD" SMD_0805 5697.21,574.92 r270 bottom
C23 "Cap SMD" SMD_0805 4979.41,2240.63 r180 bottom
C24 "Cap SMD" SMD_0805 5259.41,1915.63 r90 bottom
C25 "Cap SMD" SMD_0805 5494,1550 r180 bottom
C26 "Cap SMD" SMD_0805 4894.41,2040.63 r180 bottom
C27 "Cap SMD" SMD_0805 5489,1360 r180 bottom
C28 "Cap SMD" SMD_0805 5762.21,724.92 r270 bottom
C29 "Cap SMD" SMD_0805 5232.21,574.92 r90 bottom
C30 "Cap SMD" SMD_0805 5674,1490 r0 top
C31 "Cap SMD" SMD_0805 5209.41,2040.63 r0 bottom
C32 "15V" SMD_CAP_3216 5049.41,1930.63 r90 bottom
C33 "Cap SMD" SMD_0805 5266,3359 r180 bottom
C34 "Cap SMD" SMD_0805 5006,3519 r90 bottom
C35 "Cap SMD" SMD_0805 5257,2672.26 r180 bottom
C36 "Cap SMD" SMD_0805 4997,2842.26 r90 bottom
C37A "Cap SMD" SMD_0805 727.4,2753.31 r90 top (schematic designator C37)
C37B "Cap SMD" SMD_0805 1800.24,2753.31 r90 top (schematic designator C37)
C37C "Cap SMD" SMD_0805 2873.07,2753.31 r90 top (schematic designator C37)
C37D "Cap SMD" SMD_0805 3945.9,2753.31 r90 top (schematic designator C37)
C38 "Cap SMD" SMD_0805 5276,453 r180 top
C39 "Cap SMD" SMD_0805 5576.46,1112.84 r0 bottom
C40 "Cap SMD" SMD_0805 5396.46,1167.84 r180 bottom
C41 "Cap SMD" SMD_0805 323.46,310.51 r180 bottom
C42 "Cap SMD" SMD_0805 98.46,175.51 r270 top
C43 "Cap SMD" SMD_0805 323.46,130.51 r0 bottom
C44A "Cap SMD" SMD_0805 207,3590 r0 top (schematic designator C44)
C44B "Cap SMD" SMD_0805 975,3573 r0 top (schematic designator C44)
C44C "Cap SMD" SMD_0805 1762.4,3573 r0 top (schematic designator C44)
C44D "Cap SMD" SMD_0805 2549.8,3573 r0 top (schematic designator C44)
C44E "Cap SMD" SMD_0805 3337.2,3573 r0 top (schematic designator C44)
C44F "Cap SMD" SMD_0805 4124.61,3573 r0 top (schematic designator C44)
C45 "Cap SMD" SMD_0805 5504,869 r0 top
C46 "Cap SMD" SMD_0805 5409,853 r0 bottom
C47 "Cap SMD" SMD_0805 5182,1011 r180 top
C48 "Cap SMD" SMD_0805 5317,1316 r0 top
C49 "Cap SMD" SMD_0805 5398,954 r0 bottom
C53 "15V" SMD_CAP_3216 3880,270 r90 bottom
C54 "15V" SMD_CAP_3216 4000,275 r90 bottom
C55 "15V" SMD_CAP_3216 1220,285 r270 bottom
C56 "Cap SMD" SMD_0805 4811,1522 r90 top
C57 "15V" SMD_CAP_3216 4021,409.37 r270 top
C58 "15V" SMD_CAP_3216 3893,409.37 r270 top
C59 "35V" SMD_CAP_6032 1205,486.37 r270 top
D1A "Diode BAS16" SOT-23 547.4,2533.31 r0 top (schematic designator D1)
D1B "Diode BAS16" SOT-23 1620.24,2533.31 r0 top (schematic designator D1)
D1C "Diode BAS16" SOT-23 2693.07,2533.31 r0 top (schematic designator D1)
D1D "Diode BAS16" SOT-23 3765.91,2533.31 r0 top (schematic designator D1)
D2A "Diode BAS16" SOT-23 697.4,2533.31 r0 top (schematic designator D2)
D2B "Diode BAS16" SOT-23 1770.24,2533.31 r0 top (schematic designator D2)
D2C "Diode BAS16" SOT-23 2843.07,2533.31 r0 top (schematic designator D2)
D2D "Diode BAS16" SOT-23 3915.91,2533.31 r0 top (schematic designator D2)
Designator86 "Comment" "TARGET MECHANICAL 5" -205,-1895 r0 top
Designator87 "Comment" "TARGET MECHANICAL 5" -270,5065 r0 top
Designator88 "Comment" "TARGET MECHANICAL 5" 6845,4890 r0 top
J1 "QMSS-EM-PC4" "QMS EDGE PWR PINS" 2559.05,0 r90 top locked
K1 "AQS221" SO-16 4849,822 r270 bottom
L1A "Inductor" SMD_1210_INDUCT 299.53,2055.39 r0 top (schematic designator L1)
L1B "Inductor" SMD_1210_INDUCT 1185.36,2055.39 r0 top (schematic designator L1)
L1C "Inductor" SMD_1210_INDUCT 2071.18,2055.39 r0 top (schematic designator L1)
L1D "Inductor" SMD_1210_INDUCT 2957.01,2055.39 r0 top (schematic designator L1)
L1E "Inductor" SMD_1210_INDUCT 3842.84,2055.39 r0 top (schematic designator L1)
L1F "Inductor" SMD_1210_INDUCT 299.53,1464.84 r0 top (schematic designator L1)
L1G "Inductor" SMD_1210_INDUCT 1185.35,1464.84 r0 top (schematic designator L1)
L1H "Inductor" SMD_1210_INDUCT 2071.18,1464.84 r0 top (schematic designator L1)
L1I "Inductor" SMD_1210_INDUCT 2957.01,1464.84 r0 top (schematic designator L1)
L1J "Inductor" SMD_1210_INDUCT 3842.84,1464.84 r0 top (schematic designator L1)
L1K "Inductor" SMD_1210_INDUCT 299.53,893.98 r0 top (schematic designator L1)
L1L "Inductor" SMD_1210_INDUCT 1185.35,893.98 r0 top (schematic designator L1)
L1M "Inductor" SMD_1210_INDUCT 2071.18,893.98 r0 top (schematic designator L1)
L1N "Inductor" SMD_1210_INDUCT 2957.01,893.98 r0 top (schematic designator L1)
L1O "Inductor" SMD_1210_INDUCT 3842.83,893.98 r0 top (schematic designator L1)
L2A "Inductor" SMD_1210_INDUCT 811.34,2055.39 r180 top (schematic designator L2)
L2B "Inductor" SMD_1210_INDUCT 1697.16,2055.39 r180 top (schematic designator L2)
L2C "Inductor" SMD_1210_INDUCT 2582.99,2055.39 r180 top (schematic designator L2)
L2D "Inductor" SMD_1210_INDUCT 3468.82,2055.39 r180 top (schematic designator L2)
L2E "Inductor" SMD_1210_INDUCT 4354.64,2055.39 r180 top (schematic designator L2)
L2F "Inductor" SMD_1210_INDUCT 811.34,1464.84 r180 top (schematic designator L2)
L2G "Inductor" SMD_1210_INDUCT 1697.16,1464.84 r180 top (schematic designator L2)
L2H "Inductor" SMD_1210_INDUCT 2582.99,1464.84 r180 top (schematic designator L2)
L2I "Inductor" SMD_1210_INDUCT 3468.82,1464.84 r180 top (schematic designator L2)
L2J "Inductor" SMD_1210_INDUCT 4354.64,1464.84 r180 top (schematic designator L2)
L2K "Inductor" SMD_1210_INDUCT 811.34,893.98 r180 top (schematic designator L2)
L2L "Inductor" SMD_1210_INDUCT 1697.17,893.98 r180 top (schematic designator L2)
L2M "Inductor" SMD_1210_INDUCT 2582.99,893.98 r180 top (schematic designator L2)
L2N "Inductor" SMD_1210_INDUCT 3468.82,893.98 r180 top (schematic designator L2)
L2O "Inductor" SMD_1210_INDUCT 4354.65,893.98 r180 top (schematic designator L2)
L3A "Inductor" SMD_1210_INDUCT 867.4,2753.31 r0 top (schematic designator L3)
L3B "Inductor" SMD_1210_INDUCT 1940.24,2753.31 r0 top (schematic designator L3)
L3C "Inductor" SMD_1210_INDUCT 3013.07,2753.31 r0 top (schematic designator L3)
L3D "Inductor" SMD_1210_INDUCT 4085.9,2753.31 r0 top (schematic designator L3)
L4A "Inductor" SMD_1210_INDUCT 357.4,2653.31 r0 top (schematic designator L4)
L4B "Inductor" SMD_1210_INDUCT 1430.24,2653.31 r0 top (schematic designator L4)
L4C "Inductor" SMD_1210_INDUCT 2503.07,2653.31 r0 top (schematic designator L4)
L4D "Inductor" SMD_1210_INDUCT 3575.9,2653.31 r0 top (schematic designator L4)
L5 "600R" SMD_1206 5104.41,2175.63 r90 bottom
P1 "Header 5X2" HDR2X5 5767.72,2047.24 r90 top
P2 "Header 2" HDR1X2 4913,1475 r90 top
P3 "Header 12X2" HDR2X12 5765,2675 r90 top
Q1A "NJT4031N" "SOT223 w/PowerPAD" 486.3,3641.73 r0 top (schematic designator Q1)
Q1B "NJT4031N" "SOT223 w/PowerPAD" 1273.7,3641.73 r0 top (schematic designator Q1)
Q1C "NJT4031N" "SOT223 w/PowerPAD" 2061.1,3641.73 r0 top (schematic designator Q1)
Q1D "NJT4031N" "SOT223 w/PowerPAD" 2848.5,3641.73 r0 top (schematic designator Q1)
Q1E "NJT4031N" "SOT223 w/PowerPAD" 3635.9,3641.73 r0 top (schematic designator Q1)
Q1F "NJT4031N" "SOT223 w/PowerPAD" 4423.31,3641.73 r0 top (schematic designator Q1)
Q2A "NJT4030P" "SOT223 w/PowerPAD" 486.3,3228.35 r180 top (schematic designator Q2)
Q2B "NJT4030P" "SOT223 w/PowerPAD" 1273.7,3228.35 r180 top (schematic designator Q2)
Q2C "NJT4030P" "SOT223 w/PowerPAD" 2061.1,3228.35 r180 top (schematic designator Q2)
Q2D "NJT4030P" "SOT223 w/PowerPAD" 2848.5,3228.35 r180 top (schematic designator Q2)
Q2E "NJT4030P" "SOT223 w/PowerPAD" 3635.9,3228.35 r180 top (schematic designator Q2)
Q2F "NJT4030P" "SOT223 w/PowerPAD" 4423.31,3228.35 r180 top (schematic designator Q2)
Q3 "NJT4031N" "SOT223 w/PowerPAD" 5202.21,649.92 r90 top
Q4 "NJT4031N" "SOT223 w/PowerPAD" 5707.21,649.92 r270 top
Q5 "NJT4031N" "SOT223 w/PowerPAD" 5696.46,1082.84 r270 top
Q6 "FDV304P" SMD_SOT23_3 3381,369 r90 top
Q7 "2N7002" SOT23A 5149,1137 r270 top
R1A "Res SMD" SMD_0805 523.94,1927.44 r90 bottom (schematic designator R1)
R1B "Res SMD" SMD_0805 1409.76,1927.44 r90 bottom (schematic designator R1)
R1C "Res SMD" SMD_0805 2295.59,1927.44 r90 bottom (schematic designator R1)
R1D "Res SMD" SMD_0805 3181.42,1927.44 r90 bottom (schematic designator R1)
R1E "Res SMD" SMD_0805 4067.24,1927.44 r90 bottom (schematic designator R1)
R1F "Res SMD" SMD_0805 523.94,1336.89 r90 bottom (schematic designator R1)
R1G "Res SMD" SMD_0805 1409.76,1336.89 r90 bottom (schematic designator R1)
R1H "Res SMD" SMD_0805 2295.59,1336.89 r90 bottom (schematic designator R1)
R1I "Res SMD" SMD_0805 3181.42,1336.89 r90 bottom (schematic designator R1)
R1J "Res SMD" SMD_0805 4067.24,1336.89 r90 bottom (schematic designator R1)
R1K "Res SMD" SMD_0805 523.93,766.02 r90 bottom (schematic designator R1)
R1L "Res SMD" SMD_0805 1409.76,766.02 r90 bottom (schematic designator R1)
R1M "Res SMD" SMD_0805 2295.59,766.02 r90 bottom (schematic designator R1)
R1N "Res SMD" SMD_0805 3181.42,766.02 r90 bottom (schematic designator R1)
R1O "Res SMD" SMD_0805 4067.24,766.02 r90 bottom (schematic designator R1)
R2A "Res SMD" SMD_0805 437.32,1927.44 r270 bottom (schematic designator R2)
R2B "Res SMD" SMD_0805 1323.15,1927.44 r270 bottom (schematic designator R2)
R2C "Res SMD" SMD_0805 2208.98,1927.44 r270 bottom (schematic designator R2)
R2D "Res SMD" SMD_0805 3094.8,1927.44 r270 bottom (schematic designator R2)
R2E "Res SMD" SMD_0805 3980.63,1927.44 r270 bottom (schematic designator R2)
R2F "Res SMD" SMD_0805 437.32,1336.89 r270 bottom (schematic designator R2)
R2G "Res SMD" SMD_0805 1323.15,1336.89 r270 bottom (schematic designator R2)
R2H "Res SMD" SMD_0805 2208.98,1336.89 r270 bottom (schematic designator R2)
R2I "Res SMD" SMD_0805 3094.8,1336.89 r270 bottom (schematic designator R2)
R2J "Res SMD" SMD_0805 3980.63,1336.89 r270 bottom (schematic designator R2)
R2K "Res SMD" SMD_0805 437.32,766.02 r270 bottom (schematic designator R2)
R2L "Res SMD" SMD_0805 1323.15,766.02 r270 bottom (schematic designator R2)
R2M "Res SMD" SMD_0805 2208.98,766.02 r270 bottom (schematic designator R2)
R2N "Res SMD" SMD_0805 3094.8,766.02 r270 bottom (schematic designator R2)
R2O "Res SMD" SMD_0805 3980.63,766.02 r270 bottom (schematic designator R2)
R3A "Res SMD" SMD_0805 1057.4,2773.31 r0 top (schematic designator R3)
R3B "Res SMD" SMD_0805 2130.24,2773.31 r0 top (schematic designator R3)
R3C "Res SMD" SMD_0805 3203.07,2773.31 r0 top (schematic designator R3)
R3D "Res SMD" SMD_0805 4275.91,2773.31 r0 top (schematic designator R3)
R4A "Res SMD" SMD_0805 357.4,2483.31 r180 top (schematic designator R4)
R4B "Res SMD" SMD_0805 1430.24,2483.31 r180 top (schematic designator R4)
R4C "Res SMD" SMD_0805 2503.07,2483.31 r180 top (schematic designator R4)
R4D "Res SMD" SMD_0805 3575.91,2483.31 r180 top (schematic designator R4)
R5A "Res SMD" SMD_0805 357.4,2553.31 r0 top (schematic designator R5)
R5B "Res SMD" SMD_0805 1430.24,2553.31 r0 top (schematic designator R5)
R5C "Res SMD" SMD_0805 2503.07,2553.31 r0 top (schematic designator R5)
R5D "Res SMD" SMD_0805 3575.91,2553.31 r0 top (schematic designator R5)
R6A "Res SMD" SMD_0805 1057.4,2693.31 r180 top (schematic designator R6)
R6B "Res SMD" SMD_0805 2130.24,2693.31 r180 top (schematic designator R6)
R6C "Res SMD" SMD_0805 3203.07,2693.31 r180 top (schematic designator R6)
R6D "Res SMD" SMD_0805 4275.91,2693.31 r180 top (schematic designator R6)
R7A "Res SMD" SMD_0805 299.29,3651.57 r90 bottom (schematic designator R7)
R7B "Res SMD" SMD_0805 1086.69,3651.58 r90 bottom (schematic designator R7)
R7C "Res SMD" SMD_0805 1874.09,3651.57 r90 bottom (schematic designator R7)
R7D "Res SMD" SMD_0805 2661.5,3651.58 r90 bottom (schematic designator R7)
R7E "Res SMD" SMD_0805 3448.9,3651.58 r90 bottom (schematic designator R7)
R7F "Res SMD" SMD_0805 4236.3,3651.57 r90 bottom (schematic designator R7)
R8A "Res SMD" SMD_0805 299.29,3474.41 r90 top (schematic designator R8)
R8B "Res SMD" SMD_0805 1086.69,3474.41 r90 top (schematic designator R8)
R8C "Res SMD" SMD_0805 1874.09,3474.41 r90 top (schematic designator R8)
R8D "Res SMD" SMD_0805 2661.5,3474.41 r90 top (schematic designator R8)
R8E "Res SMD" SMD_0805 3448.9,3474.41 r90 top (schematic designator R8)
R8F "Res SMD" SMD_0805 4236.3,3474.41 r90 top (schematic designator R8)
R9A "Res SMD" SMD_0805 663.47,3224.13 r90 bottom (schematic designator R9)
R9B "Res SMD" SMD_0805 1450.87,3224.13 r90 bottom (schematic designator R9)
R9C "Res SMD" SMD_0805 2238.27,3224.13 r90 bottom (schematic designator R9)
R9D "Res SMD" SMD_0805 3025.67,3224.13 r90 bottom (schematic designator R9)
R9E "Res SMD" SMD_0805 3813.07,3224.13 r90 bottom (schematic designator R9)
R9F "Res SMD" SMD_0805 4600.47,3224.13 r90 bottom (schematic designator R9)
R10A "Res SMD" SMD_0805 663.47,3385.83 r90 top (schematic designator R10)
R10B "Res SMD" SMD_0805 1450.87,3385.83 r90 top (schematic designator R10)
R10C "Res SMD" SMD_0805 2238.27,3385.83 r90 top (schematic designator R10)
R10D "Res SMD" SMD_0805 3025.67,3385.83 r90 top (schematic designator R10)
R10E "Res SMD" SMD_0805 3813.07,3385.83 r90 top (schematic designator R10)
R10F "Res SMD" SMD_0805 4600.47,3385.83 r90 top (schematic designator R10)
R11 "Res SMD" SMD_0805 4440,40 r270 top
R12A "Res SMD" SMD_0805 309.13,3730.32 r270 top (schematic designator R12)
R12B "Res SMD" SMD_0805 1096.54,3730.31 r270 top (schematic designator R12)
R12C "Res SMD" SMD_0805 1883.94,3730.32 r270 top (schematic designator R12)
R12D "Res SMD" SMD_0805 2671.34,3730.32 r270 top (schematic designator R12)
R12E "Res SMD" SMD_0805 3458.74,3730.31 r270 top (schematic designator R12)
R12F "Res SMD" SMD_0805 4246.14,3730.32 r270 top (schematic designator R12)
R13A "Res SMD" SMD_0805 662.48,3550.2 r270 top (schematic designator R13)
R13B "Res SMD" SMD_0805 1449.88,3550.2 r270 top (schematic designator R13)
R13C "Res SMD" SMD_0805 2237.28,3550.2 r270 top (schematic designator R13)
R13D "Res SMD" SMD_0805 3024.69,3550.2 r270 top (schematic designator R13)
R13E "Res SMD" SMD_0805 3812.09,3550.2 r270 top (schematic designator R13)
R13F "Res SMD" SMD_0805 4599.49,3550.2 r270 top (schematic designator R13)
R14A "Res SMD" SMD_0805 664.88,3553.15 r90 bottom (schematic designator R14)
R14B "Res SMD" SMD_0805 1452.28,3553.15 r90 bottom (schematic designator R14)
R14C "Res SMD" SMD_0805 2239.68,3553.15 r90 bottom (schematic designator R14)
R14D "Res SMD" SMD_0805 3027.08,3553.15 r90 bottom (schematic designator R14)
R14E "Res SMD" SMD_0805 3814.48,3553.15 r90 bottom (schematic designator R14)
R14F "Res SMD" SMD_0805 4601.89,3553.15 r90 bottom (schematic designator R14)
R15 "Res SMD" SMD_0805 5296.19,574.92 r90 bottom
R16 "Res SMD" SMD_0805 5167.21,574.92 r270 bottom
R17A "Res SMD" SMD_0805 202,3364 r180 top (schematic designator R17)
R17B "Res SMD" SMD_0805 972,3345 r180 top (schematic designator R17)
R17C "Res SMD" SMD_0805 1759.4,3345 r180 top (schematic designator R17)
R17D "Res SMD" SMD_0805 2546.8,3345 r180 top (schematic designator R17)
R17E "Res SMD" SMD_0805 3334.2,3345 r180 top (schematic designator R17)
R17F "Res SMD" SMD_0805 4121.61,3345 r180 top (schematic designator R17)
R18 "Res SMD" SMD_0805 5632.21,724.92 r270 bottom
R19 "Res SMD" SMD_0805 5697.21,724.92 r90 bottom
R20A "Res SMD" SMD_0805 663.47,3179.13 r270 top (schematic designator R20)
R20B "Res SMD" SMD_0805 1450.87,3179.13 r270 top (schematic designator R20)
R20C "Res SMD" SMD_0805 2238.27,3179.13 r270 top (schematic designator R20)
R20D "Res SMD" SMD_0805 3025.67,3179.13 r270 top (schematic designator R20)
R20E "Res SMD" SMD_0805 3813.07,3179.13 r270 top (schematic designator R20)
R20F "Res SMD" SMD_0805 4600.47,3179.13 r270 top (schematic designator R20)
R21 "Res SMD" SMD_0805 5674,1425 r0 top
R22 "Res SMD" SMD_0805 5674,1360 r180 top
R23A "Res SMD" SMD_0805 201,3337 r0 bottom (schematic designator R23)
R23B "Res SMD" SMD_0805 970,3321 r0 bottom (schematic designator R23)
R23C "Res SMD" SMD_0805 1757.4,3321 r0 bottom (schematic designator R23)
R23D "Res SMD" SMD_0805 2544.8,3321 r0 bottom (schematic designator R23)
R23E "Res SMD" SMD_0805 3332.2,3321 r0 bottom (schematic designator R23)
R23F "Res SMD" SMD_0805 4119.61,3321 r0 bottom (schematic designator R23)
R24 "Res SMD" SMD_0805 5419,1455 r0 bottom
R25 "Res SMD" SMD_0805 5569,1455 r180 bottom
R26 "Res 0805" SMD_0805 5671,1555 r180 top
R27 "Res SMD" SMD_0805 5567.21,724.92 r90 bottom
R28 "Res SMD" SMD_0805 5232.21,724.92 r270 bottom
R29 "Res SMD" SMD_0805 5296.19,724.92 r270 bottom
R30 "Res SMD" SMD_0805 5167.21,724.92 r90 bottom
R31 "Res SMD" SMD_0805 5452.21,569.92 r270 top
R32 "Res SMD" SMD_0805 5452.21,719.92 r270 top
R33 "Res SMD" SMD_0805 5762.21,574.92 r270 bottom
R34 "Res SMD" SMD_0805 5567.21,574.92 r90 bottom
R35 "Res SMD" SMD_0805 5632.21,574.92 r270 bottom
R36 "Res 0805" SMD_0805 5670,1545 r0 bottom
R37 "Res SMD" SMD_0805 5576.46,1047.84 r0 bottom
R38 "Res 0805" SMD_0805 5669,1615 r180 bottom
R39 "Res SMD" SMD_0805 5741.46,1177.84 r180 bottom
R40 "Res SMD" SMD_0805 5576.46,982.84 r180 bottom
R41 "Res SMD" SMD_0805 5396.46,1017.84 r0 bottom
R42 "Res SMD" SMD_0805 5396.46,1082.84 r0 bottom
R43 "Res SMD" SMD_0805 5576.46,1177.84 r0 bottom
R44 "Res SMD" SMD_0805 5696.46,1067.84 r270 bottom
R45 "Res SMD" SMD_0805 533.46,170.51 r90 top
R46 "Res SMD" SMD_0805 468.46,170.51 r270 top
R47 "Res SMD" SMD_0805 163.46,175.51 r90 top
R48 "Res 0805" SMD_0805 5570,842.04 r180 bottom
R49 "Res 0805" SMD_0805 4867,898 r180 top
R50 "Res 0805" SMD_0805 4791,651 r90 top
R51 "Res 0805" SMD_0805 4843,797 r180 top
R52 "Res 0805" SMD_0805 4853,1082.1 r180 bottom
RN1 "RES ARRAY  x4" "RES ARRAY 0603 x 4" 5669,1882.71 r270 top
TP1A "Test Point SMD" "SMD_TEST POINT" 673.31,3730.32 r90 top (schematic designator TP1)
TP1B "Test Point SMD" "SMD_TEST POINT" 1460.71,3730.31 r90 top (schematic designator TP1)
TP1C "Test Point SMD" "SMD_TEST POINT" 2248.11,3730.32 r90 top (schematic designator TP1)
TP1D "Test Point SMD" "SMD_TEST POINT" 3035.51,3730.32 r90 top (schematic designator TP1)
TP1E "Test Point SMD" "SMD_TEST POINT" 3822.91,3730.31 r90 top (schematic designator TP1)
TP1F "Test Point SMD" "SMD_TEST POINT" 4610.31,3730.32 r90 top (schematic designator TP1)
TP2A "Test Point SMD" "SMD_TEST POINT" 299.29,3138.35 r270 top (schematic designator TP2)
TP2B "Test Point SMD" "SMD_TEST POINT" 1086.69,3138.35 r270 top (schematic designator TP2)
TP2C "Test Point SMD" "SMD_TEST POINT" 1874.09,3138.35 r270 top (schematic designator TP2)
TP2D "Test Point SMD" "SMD_TEST POINT" 2661.5,3138.35 r270 top (schematic designator TP2)
TP2E "Test Point SMD" "SMD_TEST POINT" 3448.9,3138.35 r270 top (schematic designator TP2)
TP2F "Test Point SMD" "SMD_TEST POINT" 4236.3,3138.35 r270 top (schematic designator TP2)
TP3A "Test Point SMD" "SMD_TEST POINT" 309.37,2173.5 r180 top (schematic designator TP3)
TP3B "Test Point SMD" "SMD_TEST POINT" 1195.2,2173.5 r180 top (schematic designator TP3)
TP3C "Test Point SMD" "SMD_TEST POINT" 2081.02,2173.5 r180 top (schematic designator TP3)
TP3D "Test Point SMD" "SMD_TEST POINT" 2966.85,2173.5 r180 top (schematic designator TP3)
TP3E "Test Point SMD" "SMD_TEST POINT" 3852.68,2173.5 r180 top (schematic designator TP3)
TP3F "Test Point SMD" "SMD_TEST POINT" 309.37,1582.95 r180 top (schematic designator TP3)
TP3G "Test Point SMD" "SMD_TEST POINT" 1195.2,1582.95 r180 top (schematic designator TP3)
TP3H "Test Point SMD" "SMD_TEST POINT" 2081.02,1582.95 r180 top (schematic designator TP3)
TP3I "Test Point SMD" "SMD_TEST POINT" 2966.85,1582.95 r180 top (schematic designator TP3)
TP3J "Test Point SMD" "SMD_TEST POINT" 3852.68,1582.95 r180 top (schematic designator TP3)
TP3K "Test Point SMD" "SMD_TEST POINT" 309.37,1012.09 r180 top (schematic designator TP3)
TP3L "Test Point SMD" "SMD_TEST POINT" 1195.2,1012.09 r180 top (schematic designator TP3)
TP3M "Test Point SMD" "SMD_TEST POINT" 2081.02,1012.09 r180 top (schematic designator TP3)
TP3N "Test Point SMD" "SMD_TEST POINT" 2966.85,1012.09 r180 top (schematic designator TP3)
TP3O "Test Point SMD" "SMD_TEST POINT" 3852.68,1012.09 r180 top (schematic designator TP3)
TP4A "Test Point SMD" "SMD_TEST POINT" 367.4,2783.31 r0 top (schematic designator TP4)
TP4B "Test Point SMD" "SMD_TEST POINT" 1440.24,2783.31 r0 top (schematic designator TP4)
TP4C "Test Point SMD" "SMD_TEST POINT" 2513.07,2783.31 r0 top (schematic designator TP4)
TP4D "Test Point SMD" "SMD_TEST POINT" 3585.91,2783.31 r0 top (schematic designator TP4)
TP5 "Test Point SMD" "SMD_TEST POINT" 4564,1003 r0 top
TP6 "Test Point SMD" "SMD_TEST POINT" 4907,504 r0 top
TP7 "Test Point SMD" "SMD_TEST POINT" 5058,864 r180 top
TP8 "Test Point SMD" "SMD_TEST POINT" 4613,1289 r180 top
TP9 "Test Point SMD" "SMD_TEST POINT" 138.96,315 r180 top
TP10 "Test Point SMD" "SMD_TEST POINT" 508.96,310 r180 top
TP11 "Test Point SMD" "SMD_TEST POINT" 896,3676 r270 top
TP12 "Test Point SMD" "SMD_TEST POINT" 3243,3699 r90 top
TP13 "Test Point SMD" "SMD_TEST POINT" 4821,3687 r90 top
TP14 "Test Point SMD" "SMD_TEST POINT" 164,3698 r90 top
TP15 "Test Point SMD" "SMD_TEST POINT" 4789,3020 r90 top
TP16 "Test Point SMD" "SMD_TEST POINT" 339,2968 r0 top
TP17 "Test Point SMD" "SMD_TEST POINT" 4017,3063 r0 top
TP18 "Test Point SMD" "SMD_TEST POINT" 4826,1286 r0 top
TP19 "Test Point SMD" "SMD_TEST POINT" 5091,1461 r0 top
TP20 "Test Point SMD" "SMD_TEST POINT" 4194,327 r0 top
TP21 "Test Point SMD" "SMD_TEST POINT" 912,2981 r0 top
U1A "LM3480IM3-5.0" SOT23A 644.02,2153.82 r0 top (schematic designator U1)
U1B "LM3480IM3-5.0" SOT23A 1529.84,2153.82 r0 top (schematic designator U1)
U1C "LM3480IM3-5.0" SOT23A 2415.67,2153.82 r0 top (schematic designator U1)
U1D "LM3480IM3-5.0" SOT23A 3301.5,2153.82 r0 top (schematic designator U1)
U1E "LM3480IM3-5.0" SOT23A 4187.32,2153.82 r0 top (schematic designator U1)
U1F "LM3480IM3-5.0" SOT23A 644.02,1563.27 r0 top (schematic designator U1)
U1G "LM3480IM3-5.0" SOT23A 1529.84,1563.27 r0 top (schematic designator U1)
U1H "LM3480IM3-5.0" SOT23A 2415.67,1563.27 r0 top (schematic designator U1)
U1I "LM3480IM3-5.0" SOT23A 3301.5,1563.27 r0 top (schematic designator U1)
U1J "LM3480IM3-5.0" SOT23A 4187.32,1563.27 r0 top (schematic designator U1)
U1K "LM3480IM3-5.0" SOT23A 644.02,992.4 r0 top (schematic designator U1)
U1L "LM3480IM3-5.0" SOT23A 1529.84,992.4 r0 top (schematic designator U1)
U1M "LM3480IM3-5.0" SOT23A 2415.67,992.4 r0 top (schematic designator U1)
U1N "LM3480IM3-5.0" SOT23A 3301.5,992.4 r0 top (schematic designator U1)
U1O "LM3480IM3-5.0" SOT23A 4187.32,992.4 r0 top (schematic designator U1)
U2A "FOD0708" 182H_M 555.43,1976.65 r0 top (schematic designator U2)
U2B "FOD0708" 182H_M 1441.26,1976.65 r0 top (schematic designator U2)
U2C "FOD0708" 182H_M 2327.09,1976.65 r0 top (schematic designator U2)
U2D "FOD0708" 182H_M 3212.91,1976.65 r0 top (schematic designator U2)
U2E "FOD0708" 182H_M 4098.74,1976.65 r0 top (schematic designator U2)
U2F "FOD0708" 182H_M 555.43,1386.1 r0 top (schematic designator U2)
U2G "FOD0708" 182H_M 1441.26,1386.1 r0 top (schematic designator U2)
U2H "FOD0708" 182H_M 2327.09,1386.1 r0 top (schematic designator U2)
U2I "FOD0708" 182H_M 3212.91,1386.1 r0 top (schematic designator U2)
U2J "FOD0708" 182H_M 4098.74,1386.1 r0 top (schematic designator U2)
U2K "FOD0708" 182H_M 555.43,815.24 r0 top (schematic designator U2)
U2L "FOD0708" 182H_M 1441.26,815.24 r0 top (schematic designator U2)
U2M "FOD0708" 182H_M 2327.09,815.24 r0 top (schematic designator U2)
U2N "FOD0708" 182H_M 3212.91,815.24 r0 top (schematic designator U2)
U2O "FOD0708" 182H_M 4098.74,815.24 r0 top (schematic designator U2)
U3A "IXDN404" 182H_M 555.43,2104.61 r180 bottom (schematic designator U3)
U3B "IXDN404" 182H_M 1441.26,2104.61 r180 bottom (schematic designator U3)
U3C "IXDN404" 182H_M 2327.09,2104.61 r180 bottom (schematic designator U3)
U3D "IXDN404" 182H_M 3212.91,2104.61 r180 bottom (schematic designator U3)
U3E "IXDN404" 182H_M 4098.74,2104.61 r180 bottom (schematic designator U3)
U3F "IXDN404" 182H_M 555.43,1514.06 r180 bottom (schematic designator U3)
U3G "IXDN404" 182H_M 1441.26,1514.06 r180 bottom (schematic designator U3)
U3H "IXDN404" 182H_M 2327.09,1514.06 r180 bottom (schematic designator U3)
U3I "IXDN404" 182H_M 3212.91,1514.06 r180 bottom (schematic designator U3)
U3J "IXDN404" 182H_M 4098.74,1514.06 r180 bottom (schematic designator U3)
U3K "IXDN404" 182H_M 555.43,943.19 r180 bottom (schematic designator U3)
U3L "IXDN404" 182H_M 1441.26,943.19 r180 bottom (schematic designator U3)
U3M "IXDN404" 182H_M 2327.09,943.19 r180 bottom (schematic designator U3)
U3N "IXDN404" 182H_M 3212.91,943.19 r180 bottom (schematic designator U3)
U3O "IXDN404" 182H_M 4098.74,943.19 r180 bottom (schematic designator U3)
U4A "LM3480IM3-5.0" SOT23A 617.4,2753.31 r0 top (schematic designator U4)
U4B "LM3480IM3-5.0" SOT23A 1690.24,2753.31 r0 top (schematic designator U4)
U4C "LM3480IM3-5.0" SOT23A 2763.07,2753.31 r0 top (schematic designator U4)
U4D "LM3480IM3-5.0" SOT23A 3835.91,2753.31 r0 top (schematic designator U4)
U5A "FOD0708" 182H_M 1067.4,2673.31 r270 bottom (schematic designator U5)
U5B "FOD0708" 182H_M 2140.24,2673.31 r270 bottom (schematic designator U5)
U5C "FOD0708" 182H_M 3213.07,2673.31 r270 bottom (schematic designator U5)
U5D "FOD0708" 182H_M 4285.91,2673.31 r270 bottom (schematic designator U5)
U6A "IXDN404" 182H_M 577.4,2673.31 r270 bottom (schematic designator U6)
U6B "IXDN404" 182H_M 1650.24,2673.31 r270 bottom (schematic designator U6)
U6C "IXDN404" 182H_M 2723.07,2673.31 r270 bottom (schematic designator U6)
U6D "IXDN404" 182H_M 3795.91,2673.31 r270 bottom (schematic designator U6)
U7A "FOD0708" 182H_M 927.4,2553.31 r0 top (schematic designator U7)
U7B "FOD0708" 182H_M 2000.24,2553.31 r0 top (schematic designator U7)
U7C "FOD0708" 182H_M 3073.07,2553.31 r0 top (schematic designator U7)
U7D "FOD0708" 182H_M 4145.91,2553.31 r0 top (schematic designator U7)
U8A "LT1124CS8" S8_N 476.46,3435.04 r180 bottom (schematic designator U8)
U8B "LT1124CS8" S8_N 1263.86,3435.04 r180 bottom (schematic designator U8)
U8C "LT1124CS8" S8_N 2051.26,3435.04 r180 bottom (schematic designator U8)
U8D "LT1124CS8" S8_N 2838.66,3435.04 r180 bottom (schematic designator U8)
U8E "LT1124CS8" S8_N 3626.06,3435.04 r180 bottom (schematic designator U8)
U8F "LT1124CS8" S8_N 4413.46,3435.04 r180 bottom (schematic designator U8)
U9 "EPM240T100C3" TQFP100_L 5054.41,2040.63 r0 top
U10 "FIN1002M5" SMD_SOT23_5 4540,35 r0 top
U11 "LT1124CS8" S8_N 5437.21,654.92 r270 bottom
U12 "LT1124CS8" S8_N 5494,1455 r90 top
U13 "MAX1258" QFN48_M 5136,3479 r0 top
U14 "LT1124CS8" S8_N 323.46,220.51 r90 top
U15 "REF02AU" 182H_N 693.46,215.51 r90 top
U16 "MAX1258" QFN48_M 5127,2802.26 r0 top
U18 "LT1124CS8" S8_N 5396.46,1077.84 r90 top
U19 "DS2411" SMD_SOT23_3 3225,369 r90 top
U20A "AD8605" SMD_SOT23_5 204,3487 r180 top (schematic designator U20)
U20B "AD8605" SMD_SOT23_5 975,3470 r180 top (schematic designator U20)
U20C "AD8605" SMD_SOT23_5 1762.4,3470 r180 top (schematic designator U20)
U20D "AD8605" SMD_SOT23_5 2549.8,3470 r180 top (schematic designator U20)
U20E "AD8605" SMD_SOT23_5 3337.2,3470 r180 top (schematic designator U20)
U20F "AD8605" SMD_SOT23_5 4124.61,3470 r180 top (schematic designator U20)

## Footprints (in the part's own frame and the unit in brackets; to place one, negate y for a bottom-side part, rotate by r counter-clockwise, add the part's x,y. Pads: shape width x height; smd on the part's side, far side on the other; paste and mask are expansions set on the pad)
182H_M [mm] "8-Pin Small Outline Integrated Circuit 1.27 mm Pitch, IPC Low Density"
  oval 2.5x0.7 smd: 1(-2.45,1.905) 2(-2.45,0.635) 3(-2.45,-0.635) 4(-2.45,-1.905) 5(2.45,-1.905) 6(2.45,-0.635) 7(2.45,0.635) 8(2.45,1.905)
  silkscreen extent -2.57,-2.5 0.8,2.93, body extent -2,-2.5 2,2.5, height 1.75